# Allegro board N32926tiny.brd
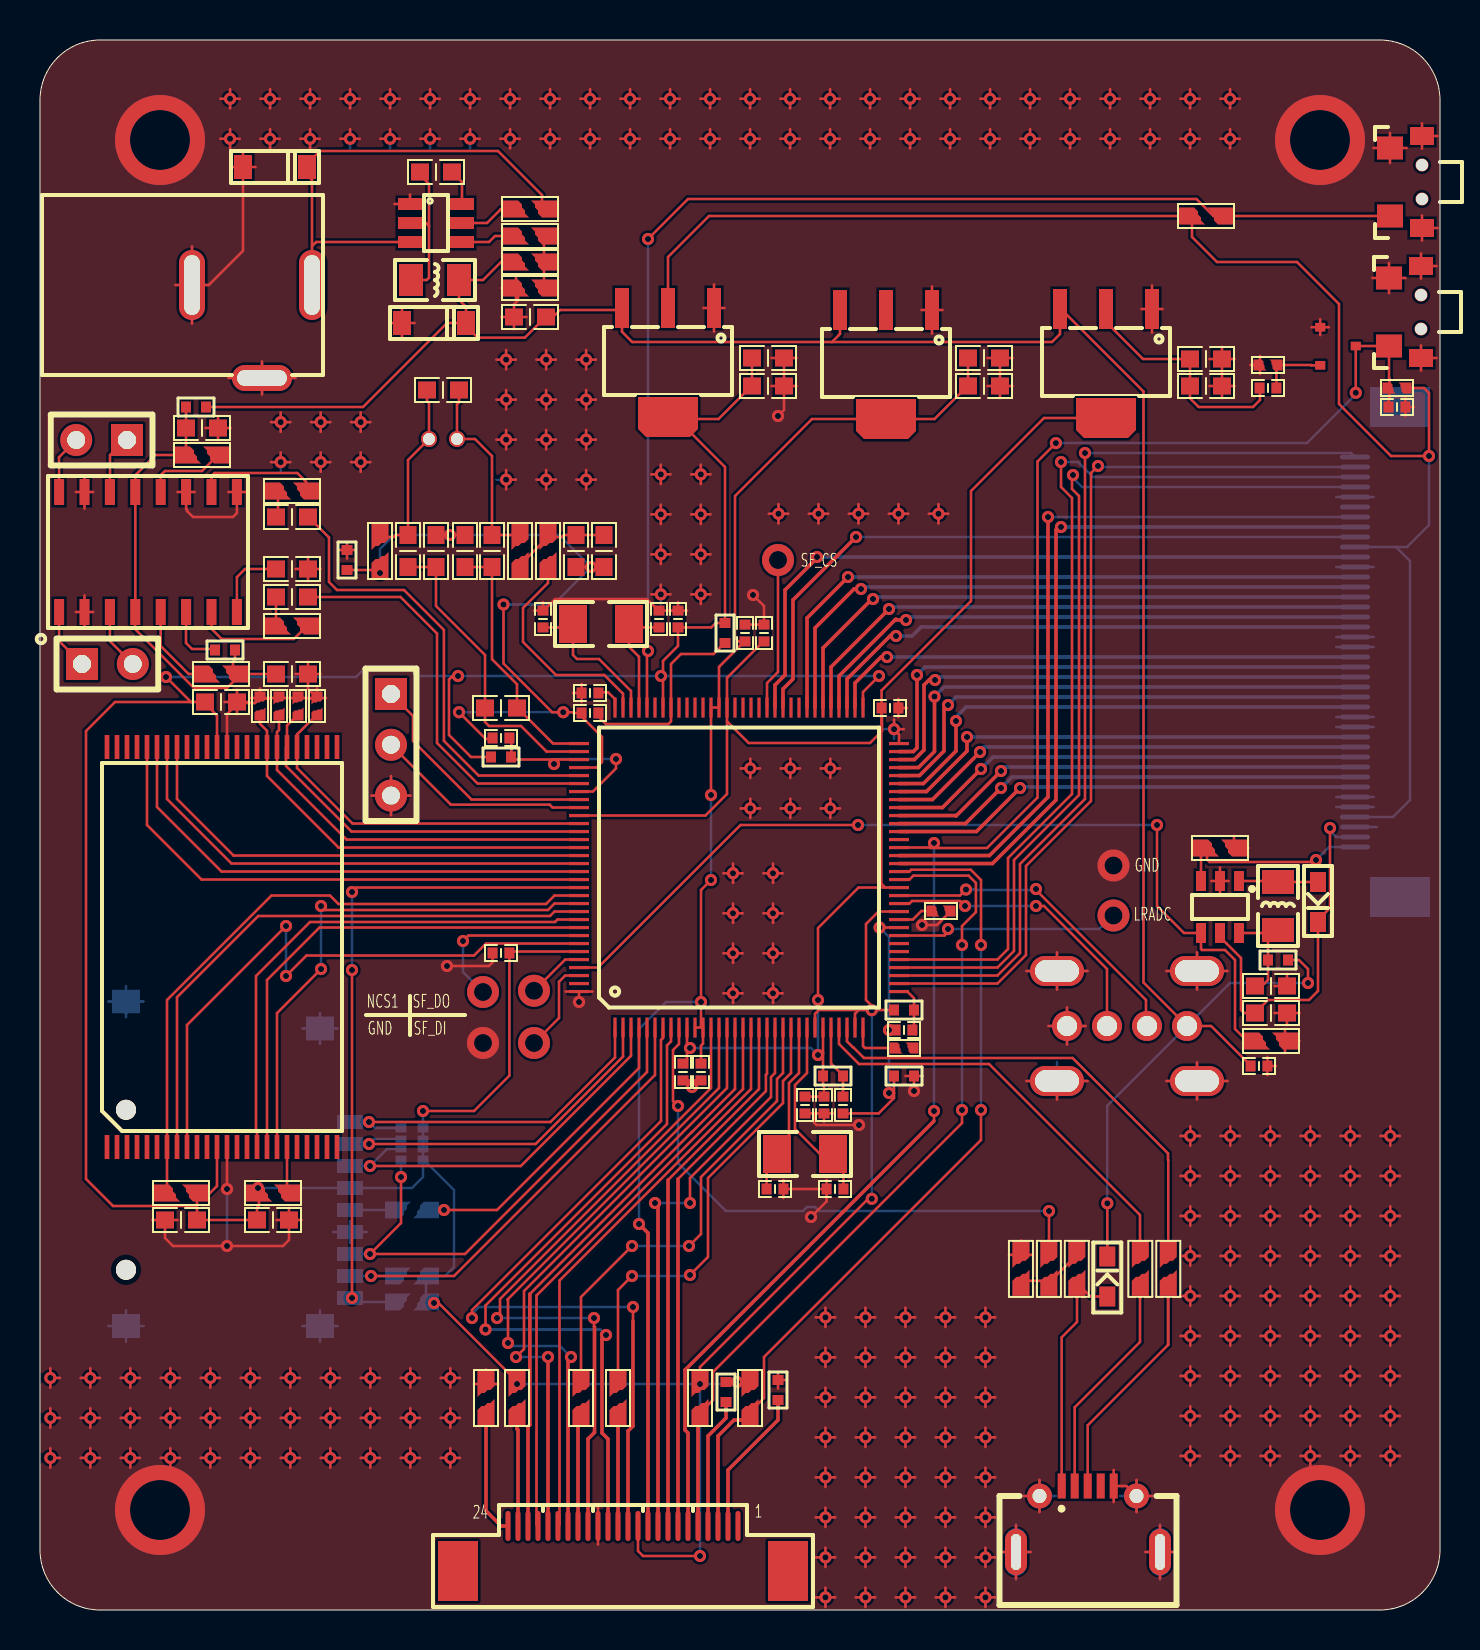
[diagram p0: board, top side]
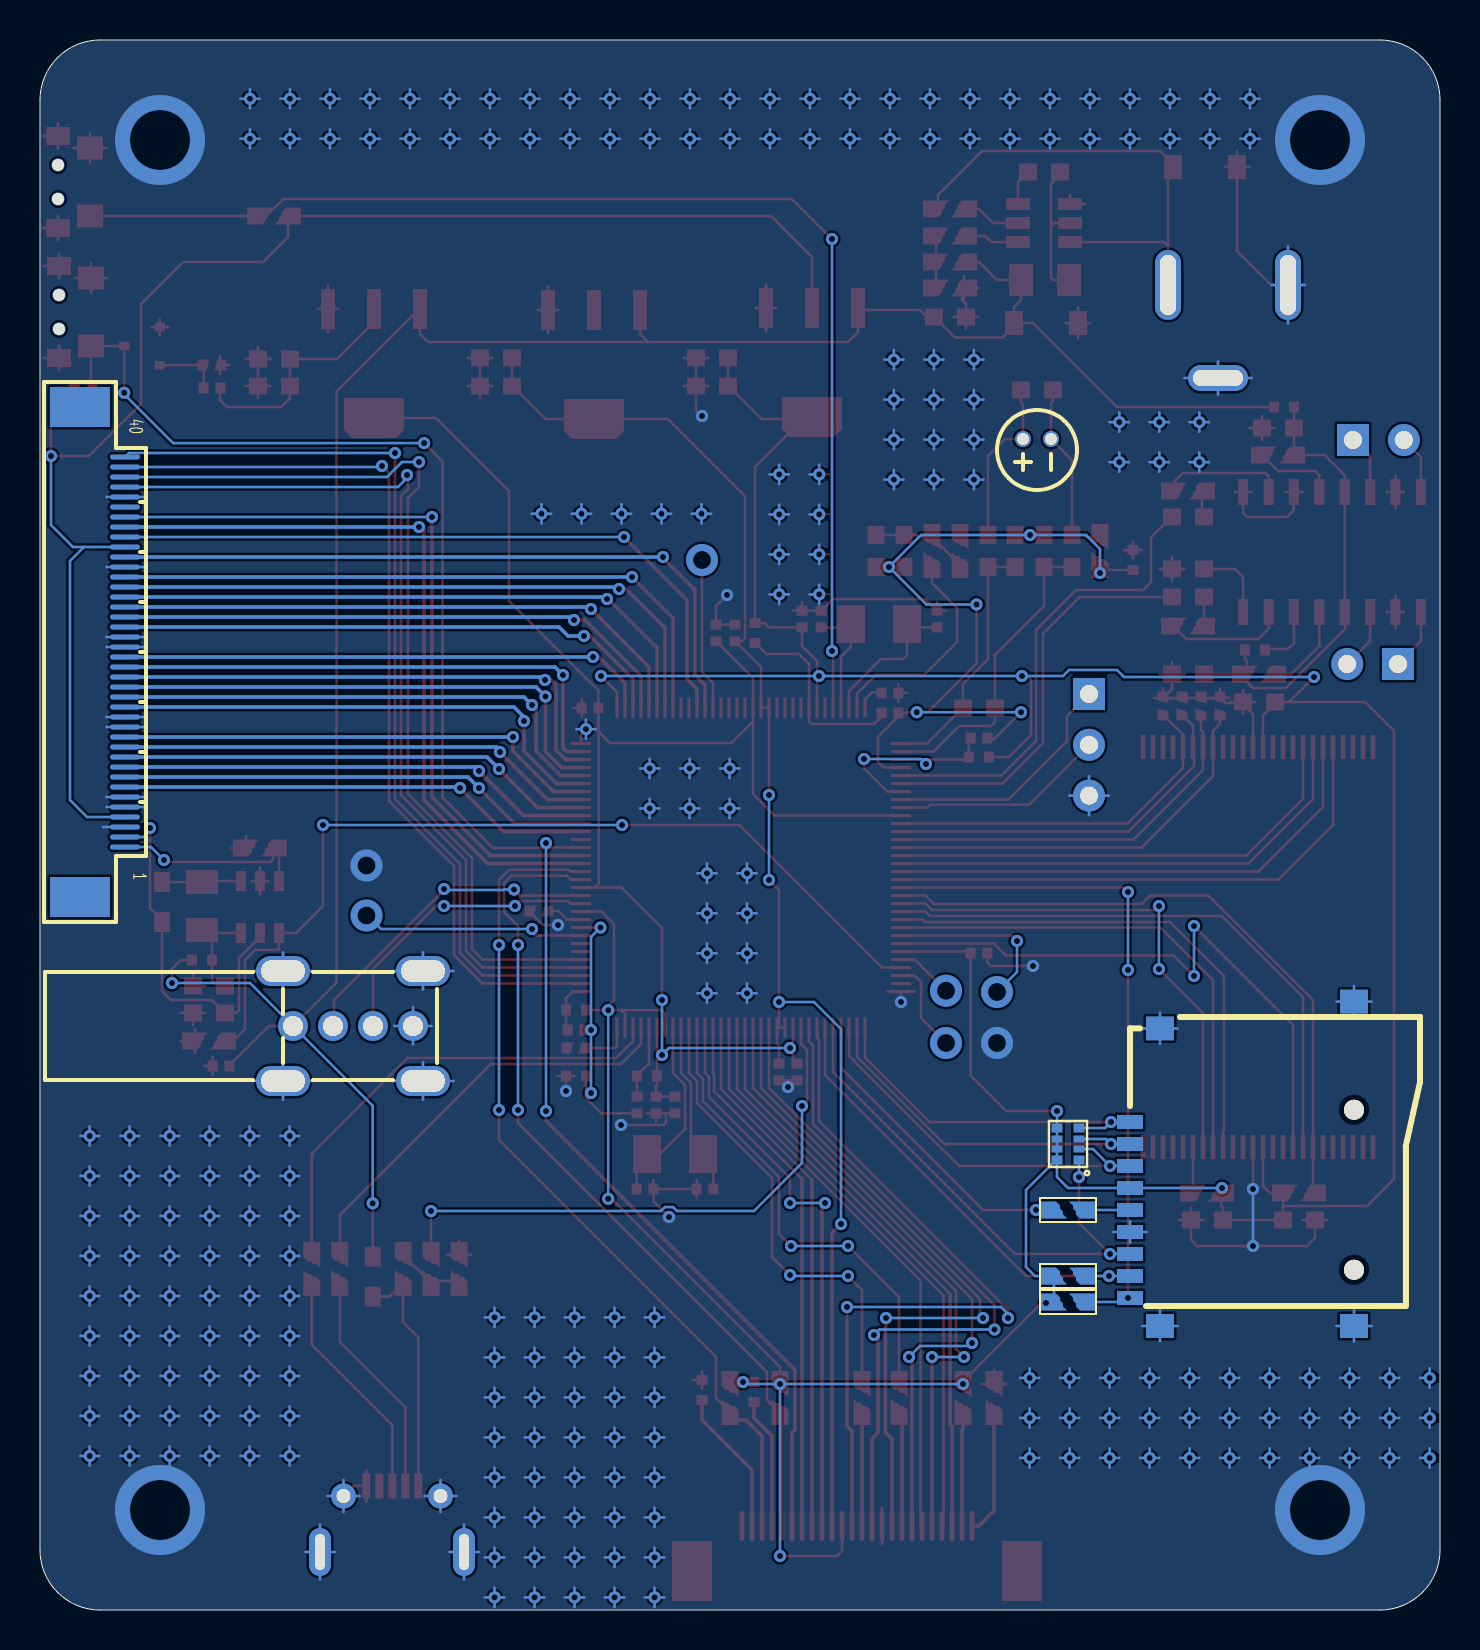
[diagram p1: board, bottom side, seen from below]

Outline 70 x 78.5 mm; copper layers: TOP, BOTTOM. Coordinates in mm from the lower left corner of the outline.
Outline path: 0,75.5 arc(0.88,77.62) 3,78.5 67,78.5 arc(69.12,77.62) 70,75.5 70,3 arc(69.12,0.88) 67,0 3,0 arc(0.88,0.88) 0,3 0,75.5

## Design rules (mm)
constraint set DEFAULT: min track width 0.127

## Placement (name value [footprint] x y rotation side)
C1  1uF  [CAP0402]  27.5 45.85 180 top
C2  15pF  [CAP0402]  30.95 49.55 90 top
C3  15pF  [CAP0402]  25.15 49.55 90 top
C4  15pF  [CAP0402]  39.75 21.05 180 top
C5  15pF  [CAP0402]  36.75 21.05 0 top
C7  100nF  [CAP0402]  32.15 26.9 270 top
C9  100nF  [CAP0402]  23.05 32.85 180 top
C10  100nF  [CAP0402]  36.2 48.85 90 top
C11  0.1uF  [CAP0402]  61.4 61.1 0 top
C12  100nF  [CAP0402]  23.05 43.6 180 top
C14  100nF  [CAP0402]  42.5 45.1 0 top
C15  0.1uF  [CAP0402]  67.85 60.15 0 top
C16  100nF  [CAP0402]  27.5 44.85 180 top
C18  100nF  [CAP0402]  39.2 25.25 270 top
C19  100nF  [CAP0402]  43.2 29 180 top
C21  100nF  [CAP0402]  38.25 25.25 270 top
C22  100nF  [CAP0402]  40.15 25.25 270 top
C23  100nF  [CAP0402]  31.9 49.55 90 top
C25  100nF  [CAP0402]  33.05 26.9 270 top
C26  100nF  [CAP0402]  35.25 48.85 90 top
C28  0.01uF  [CAP0603]  9.05 45.4 0 top
C29  0.01uF  [CAP0603]  7.05 19.5 180 top
C31  0.01uF  [CAP0603]  11.65 19.5 180 top
C32  1uF  [CAP0603]  61.55 31.2 0 top
C33  0.22uF  [CAP0603]  61.55 29.85 0 top
C34  10uF  [CAP0603]  8.1 59.1 0 top
C36  10uF  [CAP0603]  12.6 46.8 0 top
C39  220nF  [CAP0603]  12.6 50.65 180 top
C40  220nF  [CAP0603]  12.6 54.65 0 top
C41  1uF  [CAP0603]  12.6 52.05 180 top
C42  2.2uF  [CAP0603]  26.8 52.95 270 top
C43  100nF  [CAP0603]  28.2 52.95 270 top
C44  2.2uF  [CAP0603]  22.6 52.95 270 top
C45  470pF  [CAP0603]  23.05 45.1 0 top
C46  330pF  [CAP0603]  20.15 61 0 top
C47  2.2uF  [CAP0603]  18.4 52.95 270 top
C48  330pF  [CAP0603]  21.25 52.95 90 top
C49  330pF  [CAP0603]  19.8 52.95 90 top
C50  100nF  [CAP0603]  24.5 64.65 180 top
C51  2.2uF  [CAP0603]  36.4 61.2 0 top
C52  100nF  [CAP0603]  36.4 62.6 0 top
C54  2.2uF  [CAP0603]  47.2 61.2 0 top
C55  100nF  [CAP0603]  47.2 62.6 0 top
C57  2.2uF  [CAP0603]  58.3 61.2 0 top
C58  100nF  [CAP0603]  58.3 62.55 0 top
C59  1uF  [CAP0603]  19.8 71.9 0 top
C60  22uF  [CAP3216]  19.7 64.35 180 top
C61  6V/22uF  [CAP3216]  11.75 72.15 180 top
C63  0.1uF  [CAP0402]  60.95 27.2 0 top
D1  1N4148  [1N4148-SOD323]  63.9 35.4 90 top
D2  1N4148  [1N4148-SOD323]  53.36 16.68 270 top
J2  -  [TF-SOCKET]  15.5 24.4 90 bottom
J3  LCD_RGB_40P  [FPC-40]  68.1 47.9 270 bottom
J4  OV2640_DVP_24P  [FPC-24]  25.15 1.85 0 top
J5  Speaker Left  [HEADER1X2_2_54]  2.1 47.3 90 top
J6  Speaker Right  [HEADER1X2_2_54]  4.35 58.5 270 top
J7  Debug  [HEADER1X3_2_54]  17.55 45.8 0 top
J10  DC 005 25A  [DC_005_25A]  0.1 66.25 0 top
J11  USB  [USB-AF]  54.35 29.2 90 bottom
J12  USB  [MICROUSB]  52.4 5.7 180 top
L1  BLM15AG102  [BLM15AG221SN1D]  23.05 42.65 0 top
L2  BLM15AG102  [BLM15AG221SN1D]  34.25 48.85 270 top
L3  BLM15AG102  [BLM15AG221SN1D]  43.2 26.7 0 top
L4  BLM15AG102  [BLM15AG221SN1D]  34.3 10.9 90 top
L5  BLM15AG102  [BLM15AG221SN1D]  36.9 11 90 top
L6  BLM15AG102  [BLM15AG221SN1D]  61.9 32.5 180 top
L7  22uH  [MLF2012]  61.9 35.2 90 top
L8  10uH  [BLM15AG221SN1D]  9.25 48 180 top
L9  4.7uH  [MLF2012]  19.75 66.5 0 top
L10  BLM15AG102  [BLM15AG221SN1D]  7.8 60.15 0 top
L11  BLM15AG102  [BLM15AG221SN1D]  43.2 30 180 top
L12  BLM15AG102  [BLM15AG221SN1D]  39.65 26.7 180 top
L13  BLM15AG102  [BLM15AG221SN1D]  15.35 52.5 90 top
Q1  SS8050  [SOT23]  64.9 63.2 0 top
R1  12.1K 1%  [RES0402]  43.2 28.1 0 top
R2  12.1K 1%  [RES0402]  45.05 34.95 0 top
R3  100K  [RES0603]  58.3 69.7 0 top
R4  100K  [RES0402]  67.85 61.1 0 top
R5  10K  [RES0402]  61.4 62.25 180 top
R6  10K  [RES0402]  13.85 45.2 90 top
R7  10K  [RES0402]  12.9 45.2 90 top
R8  10K  [RES0402]  11.95 45.2 90 top
R9  10K  [RES0402]  11 45.2 90 top
R10  100K  [RES0603]  7.05 20.85 180 top
R11  100K  [RES0603]  11.65 20.85 0 top
R12  100K  [RES0603]  18.6 16.7 0 bottom
R13  100K  [RES0603]  18.6 15.4 0 bottom
R14  22R  [RES0603]  18.6 20 180 bottom
R15  22R  [RES0603]  28.9 10.6 270 top
R16  22R  [RES0603]  27.05 10.6 270 top
R17  0R/DNP  [RES0603]  23.85 10.6 270 top
R18  0R/DNP  [RES0603]  22.3 10.6 270 top
R19  10K  [RES0603]  33 10.6 270 top
R20  10K  [RES0603]  35.5 10.6 270 top
R21  5R1  [RES0603]  59 38.1 0 top
R22  100K  [RES0603]  61.55 28.45 0 top
R24  10K  [RES0603]  8.1 57.75 180 top
R28  10K  [RES0603]  12.6 49.2 0 top
R29  10K  [RES0603]  12.6 55.95 180 top
R30  10K  [RES0603]  9.05 46.8 180 top
R32  0R  [RES0603]  25.4 52.95 90 top
R33  1.5K  [RES0603]  24 52.95 90 top
R34  5.1K  [RES0603]  17 52.95 90 top
R35  100K  [RES0603]  24.5 70.05 180 top
R36  40.2K  [RES0603]  24.5 67.4 0 top
R37  75K  [RES0603]  24.5 68.7 0 top
R38  13K  [RES0603]  24.5 66.1 0 top
R39  22R  [RES0603]  55.02 17.06 90 top
R40  22R  [RES0603]  56.41 17.06 90 top
R41  10K  [RES0603]  50.44 17.06 90 top
R42  10K  [RES0603]  51.84 17.06 90 top
R43  22K  [RES0603]  49.05 17.06 90 top
RN1  10K 0402 RESAR  [RN4D02_0402]  18.6 23.3 90 bottom
SW1  TS_018-4.55x3.5x1.8  [TS_018-4P55X3P5X1P8]  69.1 71.4 0 top
SW2  TS_018-4.55x3.5x1.8  [TS_018-4P55X3P5X1P8]  69.05 64.9 0 top
U1  N3292xUxDN  [N3292XUXDN-LQFP128]  34.95 37.12 90 top
U2  W29N01  [W290XHVSINA-TSOP48]  9.1 33.15 90 top
U3  PT4101  [PT4101-SOT23-6]  59 35.15 270 top
U4  PAM8403  [PAM8403-SOP16]  5.4 52.9 90 top
U5  MIC  [GMI4015-MIC]  20.15 58 90 bottom
U6  AMS1117-SOT223-3-3V3  [AMS1117-SOT223-3]  31.4 62.45 180 top
U7  AMS1117-SOT223-3-1V8  [AMS1117-SOT223-3]  42.3 62.35 180 top
U8  AMS1117-SOT223-3-1V2  [AMS1117-SOT223-3]  53.3 62.4 180 top
U9  MP1470  [MP1470-TSOT23-6]  19.8 69.35 270 top
Y1  32768Hz  [CRYSTAL-3215]  28.05 49.3 180 top
Y2  12MHz  [CRYSTAL-3215]  38.25 22.8 180 top

## Library data of the parts
C1-C5 C7 C9-C12 C14-C16 C18 C19 C21-C23 C25 C26 C28 C29 C31 C50 C52 C55 C58 C63 = CAP NP
C32-C34 C36 C39-C41 C43 C45 C46 C48 C49 C59-C61 = CAPACITOR NON-POL
C42 C44 C47 C51 C54 C57 = CAP POL
D1 D2 = DIODE
J2 = TF-SOCKET
J3 = LCD_RGB_40P
J4 = OV2640_DVP_24P
J5 J6 = HEADER 2
J7 = HEADER 3
J10 = DC005-25A
J11 = USB AF
J12 = MICROUSB
L1-L6 L10-L13 = INDUCTOR
L7-L9 = INDUCTOR/SM
Q1 = BPW37/TO
R1-R20 R39-R43 = RESISTOR
R21 R22 R24 R28-R30 R32-R38 = RESISTOR/SM
RN1 = RESAR_IS_4/SM
SW1 SW2 = TS_018-4.55x3.5x1.8
U1 = N3292xUxDN
U2 = W29N01 GVSCAA
U3 = PT4101
U4 = PAM8403
U5 = MIC
U6-U8 = ASM1117-SOT223-3
U9 = MP1470
Y1 Y2 = CRYSTAL

## Footprints (pads in the part's own frame, mm; a bottom-side part is the same pattern mirrored in y, then rotated)
1N4148-SOD323
  custom 1x0.8 smd: 1(-1,0) 2(1,0)
AMS1117-SOT223-3
  custom 0.7x2 smd: 1(-2.3,-2.65) 2(0,-2.65) 3(2.3,-2.65)
  custom 3x2 smd: 4(0,2.8)
BLM15AG221SN1D
  custom 0.5x0.55 smd: 1(-0.5,0) 2(0.5,0)
CAP0402
  custom 0.5x0.55 smd: 1(-0.42,0) 2(0.42,0)
CAP0603
  custom 0.9x0.85 smd: 1(-0.8,0) 2(0.8,0)
CAP3216
  custom 0.9x1.2 smd: 1(-1.6,0) 2(1.6,0)
CRYSTAL-3215
  custom 1.4x1.9 smd: 1(-1.4,0) 2(1.4,0)
DC_005_25A
  oval 1.3x3.5 hole 0.8x3: 1(13.5,0) 2(7.5,0)
  oval 3x1.3 hole 2.5x0.8: 3(11,-4.65)
FPC-24
  rect 2x3 smd: (-4.25,0.1) (12.25,0.1)
  oval 0.25x1.5 smd: 1(9.75,2.35) 2(9.25,2.35) 3(8.75,2.35) 4(8.25,2.35) 5(7.75,2.35) 6(7.25,2.35) 7(6.75,2.35) 8(6.25,2.35) 9(5.75,2.35) 10(5.25,2.35) 11(4.75,2.35) 12(4.25,2.35) 13(3.75,2.35) 14(3.25,2.35) 15(2.75,2.35) 16(2.25,2.35) 17(1.75,2.35) 18(1.25,2.35) 19(0.75,2.35) 20(0.25,2.35) 21(-0.25,2.35) 22(-0.75,2.35) 23(-1.25,2.35) 24(-1.75,2.35)
FPC-40
  rect 2x3 smd: (-12.25,0.1) (12.25,0.1)
  oval 0.25x1.5 smd: 1(9.75,2.35) 2(9.25,2.35) 3(8.75,2.35) 4(8.25,2.35) 5(7.75,2.35) 6(7.25,2.35) 7(6.75,2.35) 8(6.25,2.35) 9(5.75,2.35) 10(5.25,2.35) 11(4.75,2.35) 12(4.25,2.35) 13(3.75,2.35) 14(3.25,2.35) 15(2.75,2.35) 16(2.25,2.35) 17(1.75,2.35) 18(1.25,2.35) 19(0.75,2.35) 20(0.25,2.35) 21(-0.25,2.35) 22(-0.75,2.35) 23(-1.25,2.35) 24(-1.75,2.35) 25(-2.25,2.35) 26(-2.75,2.35) 27(-3.25,2.35) 28(-3.75,2.35) 29(-4.25,2.35) 30(-4.75,2.35) 31(-5.25,2.35) 32(-5.75,2.35) 33(-6.25,2.35) 34(-6.75,2.35) 35(-7.25,2.35) 36(-7.75,2.35) 37(-8.25,2.35) 38(-8.75,2.35) 39(-9.25,2.35) 40(-9.75,2.35)
GMI4015-MIC
  round 0.8 hole 0.6: 1(0.55,0.7) 2(0.55,-0.7)
HEADER1X2_2_54
  rect 1.6x1.6 hole 0.9: 1(0,0)
  round 1.6 hole 0.9: 2(0,-2.54)
HEADER1X3_2_54
  rect 1.6x1.6 hole 0.9: 1(0,0)
  round 1.6 hole 0.9: 2(0,-2.54) 3(0,-5.08)
MICROUSB
  rect 0.4x1.25 smd: 1(1.315,-0.5) 2(0.665,-0.5) 3(0.015,-0.5) 4(-0.635,-0.5) 5(-1.285,-0.5)
  round 1.25 hole 0.7: 6(-2.425,0) 7(2.425,0)
  oval 1.1x2.3 hole 0.5x1.8: 8(-3.6,2.8) 9(3.6,2.8)
MLF2012
  custom 1.2x1.6 smd: 1(-1.2,0) 2(1.2,0)
MP1470-TSOT23-6
  custom 0.6x1.2 smd: 1(-0.95,-1.3) 2(0,-1.3) 3(0.95,-1.3) 4(0.95,1.3) 5(0,1.3) 6(-0.95,1.3)
N3292XUXDN-LQFP128
  custom 1x0.16 smd: 1(-8,6.2) 2(-8,5.8) 3(-8,5.4) 4(-8,5) 5(-8,4.6) 6(-8,4.2) 7(-8,3.8) 8(-8,3.4) 9(-8,3) 10(-8,2.6) 11(-8,2.2) 12(-8,1.8) 13(-8,1.4) 14(-8,1) 15(-8,0.6) 16(-8,0.2) 17(-8,-0.2) 18(-8,-0.6) 19(-8,-1) 20(-8,-1.4) 21(-8,-1.8) 22(-8,-2.2) 23(-8,-2.6) 24(-8,-3) 25(-8,-3.4) 26(-8,-3.8) 27(-8,-4.2) 28(-8,-4.6) 29(-8,-5) 30(-8,-5.4) 31(-8,-5.8) 32(-8,-6.2) 65(8,-6.2) 66(8,-5.8) 67(8,-5.4) 68(8,-5) 69(8,-4.6) 70(8,-4.2) 71(8,-3.8) 72(8,-3.4) 73(8,-3) 74(8,-2.6) 75(8,-2.2) 76(8,-1.8) 77(8,-1.4) 78(8,-1) 79(8,-0.6) 80(8,-0.2) 81(8,0.2) 82(8,0.6) 83(8,1) 84(8,1.4) 85(8,1.8) 86(8,2.2) 87(8,2.6) 88(8,3) 89(8,3.4) 90(8,3.8) 91(8,4.2) 92(8,4.6) 93(8,5) 94(8,5.4) 95(8,5.8) 96(8,6.2)
  custom 0.16x1 smd: 33(-6.2,-8) 34(-5.8,-8) 35(-5.4,-8) 36(-5,-8) 37(-4.6,-8) 38(-4.2,-8) 39(-3.8,-8) 40(-3.4,-8) 41(-3,-8) 42(-2.6,-8) 43(-2.2,-8) 44(-1.8,-8) 45(-1.4,-8) 46(-1,-8) 47(-0.6,-8) 48(-0.2,-8) 49(0.2,-8) 50(0.6,-8) 51(1,-8) 52(1.4,-8) 53(1.8,-8) 54(2.2,-8) 55(2.6,-8) 56(3,-8) 57(3.4,-8) 58(3.8,-8) 59(4.2,-8) 60(4.6,-8) 61(5,-8) 62(5.4,-8) 63(5.8,-8) 64(6.2,-8) 97(6.2,8) 98(5.8,8) 99(5.4,8) 100(5,8) 101(4.6,8) 102(4.2,8) 103(3.8,8) 104(3.4,8) 105(3,8) 106(2.6,8) 107(2.2,8) 108(1.8,8) 109(1.4,8) 110(1,8) 111(0.6,8) 112(0.2,8) 113(-0.2,8) 114(-0.6,8) 115(-1,8) 116(-1.4,8) 117(-1.8,8) 118(-2.2,8) 119(-2.6,8) 120(-3,8) 121(-3.4,8) 122(-3.8,8) 123(-4.2,8) 124(-4.6,8) 125(-5,8) 126(-5.4,8) 127(-5.8,8) 128(-6.2,8)
PAM8403-SOP16
  custom 1.3x0.5 smd: 1(-3,4.445) 2(-3,3.175) 3(-3,1.905) 4(-3,0.635) 5(-3,-0.635) 6(-3,-1.905) 7(-3,-3.175) 8(-3,-4.445) 9(3,-4.445) 10(3,-3.175) 11(3,-1.905) 12(3,-0.635) 13(3,0.635) 14(3,1.905) 15(3,3.175) 16(3,4.445)
PT4101-SOT23-6
  custom 1x0.5 smd: 1(-1.3,0.95) 2(-1.3,0) 3(-1.3,-0.95) 4(1.3,-0.95) 5(1.3,0) 6(1.3,0.95)
RES0402
  custom 0.65x0.55 smd: 1(-0.4,0) 2(0.4,0)
RES0603
  custom 1.3x0.85 smd: 1(-0.7,0) 2(0.7,0)
RN4D02_0402
  rect 0.45x0.55 smd: 1(-0.8,-0.55) 4(0.8,-0.55) 5(0.8,0.55) 8(-0.8,0.55)
  rect 0.35x0.55 smd: 2(-0.25,-0.55) 3(0.25,-0.55) 6(0.25,0.55) 7(-0.25,0.55)
SOT23
  rect 0.508x0.432 smd: 1(-0.889,0.94) 2(-0.889,-0.965) 3(0.889,0)
TF-SOCKET
  round 1 hole 1.1 unplated: (-7.39,-11.2) (0.61,-11.2)
  rect 0.7x1.3 smd: 1(0,0) 2(-1.1,0) 3(-2.2,0) 4(-3.3,0) 5(-4.4,0) 6(-5.5,0) 7(-6.6,0) 8(-7.7,0) 9(-8.8,0)
  rect 1.2x1.4 smd: 10(-10.2,-1.5) 11(4.68,-1.5) 12(-10.2,-11.2) 13(6.02,-11.2)
TS_018-4P55X3P5X1P8
  round 0.65 hole 0.6: (0,0.85) (0,-0.85)
  custom 1.2x0.9 smd: 1(0,2.3) 2(0,-2.3)
  custom 1.3x1.15 smd: 3(-1.6,1.7) 4(-1.6,-1.7)
USB-AF
  round 1.5 hole 1: 1(0,3) 2(0,1) 3(0,-1) 4(0,-3)
  oval 1.5x2.7 hole 1.1x2.2: 5(-2.75,3.5) 6(2.75,3.5) 7(-2.75,-3.5) 8(2.75,-3.5)
W290XHVSINA-TSOP48
  custom 1.2x0.23 smd: 1(-10,5.75) 2(-10,5.25) 3(-10,4.75) 4(-10,4.25) 5(-10,3.75) 6(-10,3.25) 7(-10,2.75) 8(-10,2.25) 9(-10,1.75) 10(-10,1.25) 11(-10,0.75) 12(-10,0.25) 13(-10,-0.25) 14(-10,-0.75) 15(-10,-1.25) 16(-10,-1.75) 17(-10,-2.25) 18(-10,-2.75) 19(-10,-3.25) 20(-10,-3.75) 21(-10,-4.25) 22(-10,-4.75) 23(-10,-5.25) 24(-10,-5.75) 25(10,-5.75) 26(10,-5.25) 27(10,-4.75) 28(10,-4.25) 29(10,-3.75) 30(10,-3.25) 31(10,-2.75) 32(10,-2.25) 33(10,-1.75) 34(10,-1.25) 35(10,-0.75) 36(10,-0.25) 37(10,0.25) 38(10,0.75) 39(10,1.25) 40(10,1.75) 41(10,2.25) 42(10,2.75) 43(10,3.25) 44(10,3.75) 45(10,4.25) 46(10,4.75) 47(10,5.25) 48(10,5.75)

## Nets
AVDD1V2: C22.1 L12.1 U1.28
AVDD3V3: C19.1 L11.1 U1.33
AVDD3V3_AUDIO: C12.1 L1.2 U1.99 U1.103
AVDD3V3_TV: C16.1 L2.2 U1.89
AVDD5V: C34.1 C36.1 L8.1 L10.1 R24.2 R30.1 U4.4 U4.13
DVDD1V2: C7.1 C10.1 C11.1 C14.1 C18.1 C21.1 C57.1 C58.1 L12.2 U1.10 U1.27 U1.46 U1.82 U1.106 U8.2 U8.4(VOUT)
DVDD1V8: C25.1 C26.1 C54.1 C55.1 J4.10 U1.11 U1.12 U1.83 U1.84 U7.2 U7.4(VOUT)
DVDD5V: C50.1 C60.1 C63.1 D2.1(K) J11.1(VBUS) L6.1 L9.2 L10.2 R36.1 U6.3 U7.3 U8.3
DVDD33: C9.1 C23.1 C28.1 C29.1 C31.2 C51.1 C52.1 J2.4(VDD) J3.4 J3.31 J4.11 L1.1 L2.1 L4.2 L11.2 R3.1 R4.2 R10.1 R11.1 R12.2 R13.2 R17.1 R19.1 R20.1 RN1.5 RN1.6 RN1.7 RN1.8 U1.26 U1.31 U1.43 U1.65 U1.90 U1.123 U2.12 U2.37 U6.2 U6.4(VOUT)
GND: C1.2 C2.2 C3.2 C4.2 C5.2 C7.2 C9.2 C10.2 C14.2 C15.2 C18.2 C21.2 C23.2 C25.2 C26.2 C28.2 C29.2 C31.1 C32.2 C33.2 C34.2 C36.2 C41.1 C50.2 C51.2 C52.2 C54.2 C55.2 C57.2 C58.2 C60.2 C61.2 C63.2 J2.6 J2.10 J2.11 J2.12 J2.13 J3.3 J3.5 J3.6 J3.13 J3.14 J3.21 J3.22 J3.29 J3.36 J4.15 J7.3 J10.2(COM) J10.3 J11.4 J11.5 J11.6 J11.7 J11.8 J12.5 J12.6 J12.7 J12.8 J12.9 L3.2 L5.2 L13.2 Q1.1(EMITTER) R1.2 R2.2 R5.2 R6.2 R7.2 R8.2 R9.2 R18.1 R21.2 R22.2 R38.1 R43.2 SW1.1 SW1.2 SW1.3 SW2.1 SW2.2 SW2.3 U1.64 U1.128 U2.13 U2.36 U3.2 U4.2 U4.9 U4.11 U4.15 U6.1 U7.1 U8.1 U9.1
GND_FIELD SIGNAL: C19.2 C22.2 L3.1 U1.41
GND_SIGNAL: C12.2 C16.2 C42.2 C43.2 C48.2 C49.2 L13.1 R34.1 U1.100
PVIN: C61.1 J10.1 R35.1 U9.3
ADC_MID: C1.1 U1.96
BL_5V: C32.1 L6.2 L7.1 U3.6
BL_ADJ: R22.1 U1.125 U3.4
DEBUG_RX: J7.2 U1.105
DEBUG_TX: J7.1 U1.104
ETH_CRS: U1.85
ETH_INT: U1.52
ETH_MDC: U1.74
ETH_MDIO: U1.78
ETH_REFCLK: U1.73
ETH_RESET: C15.1 J4.6 Q1.3 R4.1 SW2.4 U1.51
ETH_RXD0: U1.86
ETH_RXD1: U1.87
ETH_RXER: U1.88
ETH_TXD0: U1.79
ETH_TXD1: U1.80
ETH_TXEN: U1.81
GPG7: U1.38
HPOUTL: C39.1 U1.102
HPOUTR: C40.2 U1.101
ISI_HSYNC: J4.9 U1.21
ISI_PCLK: R16.1 U1.22
ISI_PWDN: J4.8 U1.19
ISI_SCL: J4.5 R19.2 U1.47
ISI_SCLK: R15.1 U1.23
ISI_SDA: J4.3 R20.2 U1.48
ISI_VSYNC: J4.7 U1.20
LED+: C33.1 D1.1(K) J3.2 U3.5
LED-: J3.1 R21.1 U3.3
LHSYNC: J3.32 U1.75
LPCLK: J3.30 U1.76
LRADC: U1.40
LVD0: J3.23 U1.67
LVD1: J3.24 U1.68
LVD2: J3.25 U1.69
LVD3: J3.26 U1.70
LVD4: J3.27 U1.71
LVD5: J3.28 U1.72
LVD6: J3.15 U1.59
LVD7: J3.16 U1.60
LVD8: J3.17 U1.61
LVD9: J3.18 U1.62
LVD10: J3.19 U1.63
LVD11: J3.20 U1.66
LVD12: J3.7 U1.53
LVD13: J3.8 U1.54
LVD14: J3.9 U1.55
LVD15: J3.10 U1.56
LVD16: J3.11 U1.57
LVD17: J3.12 U1.58
LVDE: J3.34 U1.50
LVSYNC: J3.33 U1.49
MIC_BIAS: R32.1 U1.95
MIC_INN: C45.1 C47.2 C49.1 U1.98
MIC_INP: C44.2 C45.2 C48.1 U1.97
MUTE: R30.2 U4.5
NALE: U1.120 U2.17
NBUSY0: R10.2 U1.116 U2.7
NCLE: U1.119 U2.16
NCS0: U1.122 U2.9
NCS1: U1.121
ND0: R6.1 U1.107 U2.29
ND1: R7.1 U1.108 U2.30
ND2: R8.1 U1.109 U2.31
ND3: R9.1 U1.110 U2.32
ND4: U1.111 U2.41
ND5: U1.112 U2.42
ND6: U1.113 U2.43
ND7: U1.114 U2.44
NRE: U1.118 U2.8
NWR: U1.117 U2.18
OUTLM: J5.2 U4.3
OUTLP: J5.1 U4.1
OUTRM: J6.1 U4.14
OUTRP: J6.2 U4.16
RTC_XIN: C2.1 U1.93 Y1.1
RTC_XOUT: C3.1 U1.94 Y1.2
SD_CD: J2.9 R13.1 U1.115
SD_CLK: R14.1 U1.4
SD_CMD: J2.3 RN1.2 U1.3
SD_D0: J2.7 RN1.1 U1.5
SD_D1: J2.8 R12.1 U1.6
SD_D2: J2.1 RN1.4 U1.1
SD_D3: J2.2 RN1.3 U1.2
SF_CLK: U1.127
SF_CS: U1.77
SF_DI: U1.126
SF_DO: U1.124
SPD0: J4.19 U1.18
SPD1: J4.21 U1.17
SPD2: J4.22 U1.16
SPD3: J4.20 U1.15
SPD4: J4.18 U1.14
SPD5: J4.16 U1.13
SPD6: J4.14 U1.8
SPD7: J4.12(Y9) U1.7
TP_XM: J3.39 U1.34
TP_XP: J3.37 U1.36
TP_YM: J3.40(YU) U1.35
TP_YP: J3.38 U1.37
UD_REXT: R1.1 U1.32
UH_DM: J11.2 U1.45
UH_DP: J11.3 U1.44
UH_REXT: R2.1 U1.42
USB_DET: R41.2 U1.9
USB_DM: R39.2 U1.29
USB_DP: R40.2 U1.30
USB_VIN: D2.2 J12.1(VBUS) R42.1
XIN: C4.1 U1.25 Y2.1
XOUT: C5.1 U1.24(XOUT) Y2.2
N04211: R11.2 U2.19(W\P\)
N06862: J2.5 R14.2
N15646006: J4.13 R15.2
N15646070: J4.17 R16.2
N15676008: R24.1 U4.12
N15676062: L8.2 U4.6
N15676114: C39.2 R28.1
N15676138: R28.2 U4.7
N15676142: R29.1 U4.10
N15676150: C40.1 R29.2
N15676164: C41.2 U4.8(VREF)
N15687660: C59.2 U9.6
N15687760: C59.1 L9.1 U9.2(SW)
N15687792: R35.2 U9.5
N15687876: R36.2 R37.2 R38.2
N15687912: R37.1 U9.4
N15691835: D1.2 L7.2 U3.1(SW)
N15705525: C42.1 C43.1 R32.2 R33.1
N15705529: C44.1 C46.2 R33.2 U5.1
N15705631: C46.1 C47.1 R34.2 U5.2(-)
N15714383: J12.2 R39.1
N15714387: J12.3 R40.1
N15739714: R3.2 SW1.4 U1.92
N15742573: C11.2 Q1.2 R5.1
N15750041: R41.1 R42.2 R43.1
N15763803: J4.24 R18.2
N15763807: J4.23 R17.2
N15841040: J4.4 L4.1
N15841559: J4.2 L5.1

Pads without a net: J3 35; J4 1; J12 4; U1 39 91; U2 1 2 3 4 5 6 10 11 14 15 20 21 22 23 24 25 26 27 28 33 34 35 38 39 40 45 46 47 48

## Via types
v1: diameter 0.61, hole 0.305, TOP to BOTTOM, 348 vias
v2: diameter 1.6, hole 0.9, TOP to BOTTOM, 7 vias
v3: diameter 4.5, hole 3, TOP to BOTTOM, 4 vias

## Routing (per net, layer and track width the routed paths; a pad name or vN(x,y) marks a point on that pad's centre or on a via; arc(x,y) is an arc through that point)
AVDD1V2: length 3.7
  TOP w0.127: U1.28 39.55,27.3 39.58,27.3 40.15,26.73 L12.1 C22.1
AVDD3V3: length 2.5
  TOP w0.127: U1.33 43.37,30.92 43.7,30.59 L11.1 43.7,29.08 C19.1
AVDD3V3_AUDIO: length 10.8
  TOP w0.127: v1(25.7,42.3) 25.7,42.32 25.9,42.52 ; v1(28.8,42.55) 28.8,42.08 27.64,40.92 U1.103 ; 25.9,42.52 23.68,42.52 L1.2 23.57,42.67 23.57,43.55 23.52,43.6 C12.1 ; 25.9,42.52 U1.99
  BOTTOM w0.127: v1(25.7,42.3) 25.95,42.55 v1(28.8,42.55)
AVDD3V3_TV: length 10.3
  TOP w0.127: 27.92,44.67 C16.1 27.92,44.87 ; 27.92,44.67 27.75,44.84 27.75,44.87 ; 27.92,44.67 28.29,44.3 31.42,44.3 31.55,44.43 U1.89 31.55,47.3 32.05,47.8 33.67,47.8 34.23,48.35 L2.2
AVDD5V: length 23.2
  TOP w0.127: R30.1 9.75,46.5 9.35,46.1 7.7,46.1 4.75,49.05 4.75,49.88 U4.4 U4.13 4.77,56.74 5.77,57.75 R24.2 7.3,57.85 C34.1 L10.1 ; R30.1 9.65,46.9 9.65,47.42 9.75,47.52 L8.1 ; R30.1 C36.1
DVDD1V2: length 92
  TOP w0.127: 39.15,27.85 L12.2 39.15,26.23 39.2,26.18 C18.1 C21.1 ; 39.15,27.85 U1.27 ; 39.15,27.85 39.05,27.75 v1(38.9,27.75) ; U1.106 33.27,39.72 34.35,40.8 34.35,44.43 ; v1(32.5,28.1) 32.4,28.2 32.35,28.2 ; C7.1 32.35,27.52 32.35,28.2 ; 42.26,36.12 42.07,36.32 42.07,44.62 42.08,44.63 ; 42.26,36.12 40.92,36.12 38.9,34.1 v1(38.9,30.5) ; 42.26,36.12 U1.46 ; U8.4 50.2,59.6 46.55,55.95 46.55,50.45 42.08,45.98 C14.1 42.08,44.63 ; C10.1 36.17,48.43 34.35,46.6 U1.82 34.35,44.43 ; 42.08,44.63 42.1,44.61 42.1,43.95 41.5,43.35 35.43,43.35 34.35,44.43 ; 32.35,28.2 U1.10 ; U8.2 53.3,64.4 55.15,62.55 C58.1 C57.1 57.5,60.58 57.93,60.15 60.65,60.15 61,60.5 61,61.08 C11.1
  BOTTOM w0.127: v1(32.5,28.1) 38.55,28.1 v1(38.9,27.75) v1(38.9,30.5)
DVDD1V8: length 74.4
  TOP w0.127: U1.12 33.15,28.31 33.05,28.21 C25.1 ; U1.12 33.05,29.22 v1(33.05,30.4) 33.05,36 v1(33.55,36.5) ; U1.12 U1.11 ; 35.23,48.43 34.92,48.43 34.75,48.6 34.75,55.7 38.6,59.55 U7.4 44.73,59.55 46.38,61.2 C54.1 C55.1 ; 35.23,48.43 33.95,47.16 U1.83 U1.84 v1(33.55,40.75) ; 35.23,48.43 C26.1
  TOP w0.18: v1(29.95,19.3) 30.4,18.85 J4.10
  BOTTOM w0.127: v1(29.95,19.3) 29.95,29.05 31.3,30.4 v1(33.05,30.4) ; v1(33.55,36.5) v1(33.55,40.75)
DVDD5V: length 120.3
  TOP w0.127: C60.1 21.3,64.2 21.88,63.62 24.24,63.62 25.27,64.65 C50.1 25.65,64.65 26,65 29.05,65 29.05,65.2 29.1,65.15 U6.3 29.1,63.91 29.61,63.4 39.6,63.4 ; C60.1 21.3,65.16 20.95,65.51 L9.2 22.15,66.5 23.05,67.4 R36.1 ; C60.1 20.35,64.35 16.15,60.15 L10.2 ; v1(63.4,31.35) 63.4,32.05 62.95,32.5 L6.1 ; 39.6,63.4 50.6,63.4 51,63.8 U8.3 51.05,65.05 55.17,60.93 55.17,31.38 J11.1 58.55,29.2 60.53,27.23 C63.1 ; 39.6,63.4 39.95,63.75 39.95,63.76 40,63.81 U7.3 ; D2.1 v1(53.36,20.34)
  BOTTOM w0.127: v1(53.36,20.34) 53.36,25.21 J11.1 59.5,31.35 v1(63.4,31.35)
DVDD33: length 297.1
  TOP w0.127: v1(41.59,20.56) 41.41,20.56 33,12.15 v1(33,11.3) ; U1.43 41.92,34.92 41.3,34.3 41.3,30.5 41.59,30.21 ; 41.59,30.21 41.8,30 ; 41.59,30.21 v1(41.59,29.99) ; 41.8,30 40.94,30 ; 41.8,30 L11.2 ; L4.2 v1(34.85,11.4) 35.4,11.4 R20.1 ; 7.76,20.84 R10.1 ; 7.76,20.84 7.85,20.75 7.85,20.15 ; 7.76,20.84 8.49,20.84 8.85,21.2 U2.12 ; 7.55,45.4 3.75,45.4 2.3,43.95 2.3,21.55 3.65,20.2 7.8,20.2 7.85,20.15 ; 7.55,45.4 C28.1 8.25,45.38 ; 7.55,45.4 v1(6.3,46.65) ; 7.85,20.15 C29.1 ; 20.58,46.65 20.63,46.7 v1(20.9,46.7) ; 20.58,46.65 20.95,46.65 ; 20.58,46.65 20.45,46.52 20.45,43.75 21.55,42.65 L1.1 ; 8.25,45.33 8.23,45.35 8.25,45.38 ; 8.25,45.33 8.85,44.73 U2.37 ; 8.25,45.33 8.25,45.38 ; v1(41.95,46.7) 41.15,45.9 U1.65 ; 31.85,59.55 31.75,59.65 U6.4 ; 31.85,59.55 34.25,57.15 L2.1 33.78,49.35 33.56,49.13 C23.1 31.9,48.2 31.15,47.45 31.15,46.85 ; 31.85,59.55 31.35,59.55 ; 31.85,59.55 33.92,59.55 35.58,61.2 C51.1 C52.1 ; C29.1 C31.2 10.85,20.12 10.95,20.22 R11.1 ; C29.1 7.85,19.45 ; 40.94,30 40.75,29.81 U1.31 ; 40.94,30 38.94,30 38.75,29.81 U1.26 38.75,28.87 ; 31.15,46.85 31.05,46.75 v1(31.05,46.7) ; 31.15,46.85 U1.90 ; R4.2 69.2,61.1 69.45,60.85 v1(69.45,57.7) 67.55,57.7 64.95,60.3 64.95,65.3 62.85,67.4 58.85,67.4 57.6,68.65 R3.1 33.45,69.7 31.4,67.65 U6.2 ; v1(19.7,15.35) 19.93,15.35 23.85,11.42 v1(23.85,11.3) ; J4.11 29.9,2.95 30.15,2.7 v1(33,2.7) ; U1.123 23.54,32.92 C9.1 23.47,26.72 21.7,24.95 v1(19.15,24.95)
  BOTTOM w0.127: v1(33,2.7) v1(33,11.3) ; v1(33,11.3) 34.75,11.3 v1(34.85,11.4) ; v1(33,11.3) v1(23.85,11.3) ; v1(10.9,21.1) J2.4 18.6,21.1 19.15,21.65 RN1.8 ; v1(41.95,46.7) v1(31.05,46.7) v1(20.9,46.7) 18.85,46.7 18.55,47 16.15,47 15.8,46.65 v1(6.3,46.65) ; RN1.8 19.2,22.5 20.7,21 20.7,17.15 20.25,16.7 R12.2 R13.2 ; RN1.8 RN1.7 RN1.6 RN1.5 v1(19.15,24.95) ; 67.8,53.15 68.35,53.15 69.45,54.25 v1(69.45,57.7) ; 67.8,53.15 J3.31 ; 67.8,53.15 68.5,52.45 68.5,40.5 67.65,39.65 J3.4 ; v1(41.59,20.56) v1(41.59,29.99)
GND: length 1160.5
  TOP w0.127: 40.44,54.81 v1(40.92,54.81) ; v1(40.92,54.81) 41.41,54.81 ; v1(40.92,54.81) 40.92,54.33 ; v1(40.92,54.81) 40.92,55.29 ; v1(63.51,11.7) 64,11.7 ; v1(63.51,11.7) 63.51,11.22 ; v1(63.51,11.7) 63.51,12.18 ; v1(63.51,11.7) 63.03,11.7 ; 59.03,15.7 v1(59.51,15.7) ; v1(59.51,15.7) 60,15.7 ; v1(59.51,15.7) 59.51,16.18 ; v1(59.51,15.7) 59.51,15.22 ; v1(47.27,14.63) 47.76,14.63 ; v1(47.27,14.63) 47.27,14.15 ; v1(47.27,14.63) 46.79,14.63 ; v1(47.27,14.63) 47.27,15.12 ; v1(31.5,73.56) 31.5,74.04 ; v1(31.5,73.56) 31.02,73.56 ; v1(31.5,73.56) 31.99,73.56 ; v1(31.5,73.56) 31.5,73.08 ; v1(41.27,14.63) 41.27,15.12 ; v1(41.27,14.63) 41.76,14.63 ; v1(41.27,14.63) 41.27,14.15 ; v1(41.27,14.63) 40.79,14.63 ; v1(39.27,12.63) 39.27,13.12 ; v1(39.27,12.63) 38.79,12.63 ; v1(39.27,12.63) 39.27,12.15 ; v1(39.27,12.63) 39.76,12.63 ; 16.03,9.6 v1(16.52,9.6) ; v1(16.52,9.6) 16.52,10.09 ; v1(16.52,9.6) 17,9.6 ; v1(16.52,9.6) 16.52,9.12 ; 61.03,21.7 v1(61.51,21.7) ; v1(61.51,21.7) 61.51,21.22 ; v1(61.51,21.7) 62,21.7 ; v1(61.51,21.7) 61.51,22.18 ; 67.03,13.7 v1(67.51,13.7) ; v1(67.51,13.7) 67.51,14.18 ; v1(67.51,13.7) 68,13.7 ; v1(67.51,13.7) 67.51,13.22 ; 41.27,12.15 v1(41.27,12.63) ; v1(41.27,12.63) 40.79,12.63 ; v1(41.27,12.63) 41.76,12.63 ; v1(41.27,12.63) 41.27,13.12 ; 38.79,6.63 v1(39.27,6.63) ; v1(39.27,6.63) 39.27,7.12 ; v1(39.27,6.63) 39.76,6.63 ; v1(39.27,6.63) 39.27,6.15 ; 54.83,4.9 J12.6 ; J12.6 55.63,5.7 ; J12.6 54.83,6.5 ; J12.6 54.33,6.2 J12.5 ; 57.03,17.7 v1(57.51,17.7) ; v1(57.51,17.7) 57.51,18.18 ; v1(57.51,17.7) 57.51,17.22 ; v1(57.51,17.7) 58,17.7 ; v1(55.5,73.56) 55.5,74.04 ; v1(55.5,73.56) 55.02,73.56 ; v1(55.5,73.56) 55.5,73.08 ; v1(55.5,73.56) 55.99,73.56 ; 8.27,59.1 C34.2 ; C34.2 9.53,59.1 ; C34.2 8.9,58.5 ; C34.2 8.9,59.7 ; 6.03,11.6 v1(6.52,11.6) ; v1(6.52,11.6) 6.52,11.12 ; v1(6.52,11.6) 7,11.6 ; v1(6.52,11.6) 6.52,12.09 ; 51.5,75.08 v1(51.5,75.56) ; v1(51.5,75.56) 51.99,75.56 ; v1(51.5,75.56) 51.02,75.56 ; v1(51.5,75.56) 51.5,76.04 ; 9.5,73.08 v1(9.5,73.56) ; v1(9.5,73.56) 9.99,73.56 ; v1(9.5,73.56) 9.02,73.56 ; v1(9.5,73.56) 9.5,74.04 ; 24.82,62.52 v1(25.3,62.52) ; v1(25.3,62.52) 25.79,62.52 ; v1(25.3,62.52) 25.3,63 ; v1(25.3,62.52) 25.3,62.03 ; 61.51,23.22 v1(61.51,23.7) ; v1(61.51,23.7) 62,23.7 ; v1(61.51,23.7) 61.51,24.18 ; v1(61.51,23.7) 61.03,23.7 ; v1(57.51,7.7) 57.51,8.18 ; v1(57.51,7.7) 57.51,7.22 ; v1(57.51,7.7) 57.03,7.7 ; v1(57.51,7.7) 58,7.7 ; 63.51,13.22 v1(63.51,13.7) ; v1(63.51,13.7) 64,13.7 ; v1(63.51,13.7) 63.03,13.7 ; v1(63.51,13.7) 63.51,14.18 ; 60.43,38.1 R21.2 59.7,38.7 ; 34.65,34.35 v1(34.65,34.84) ; v1(34.65,34.84) 34.65,35.32 ; v1(34.65,34.84) 34.17,34.84 ; v1(34.65,34.84) 35.13,34.84 ; 12.03,7.6 v1(12.52,7.6) ; v1(12.52,7.6) 12.52,7.12 ; v1(12.52,7.6) 12.52,8.09 ; v1(12.52,7.6) 13,7.6 ; 57.85,31.02 J11.6 ; J11.6 59.38,31.95 ; J11.6 57.85,32.88 ; J11.6 56.32,31.95 ; L5.2 37.35,11.5 ; L5.2 36.9,11.93 ; L5.2 36.9,11.07 ; 46.79,10.63 v1(47.27,10.63) ; v1(47.27,10.63) 47.76,10.63 ; v1(47.27,10.63) 47.27,10.15 ; v1(47.27,10.63) 47.27,11.12 ; 21.5,75.08 v1(21.5,75.56) ; v1(21.5,75.56) 21.02,75.56 ; v1(21.5,75.56) 21.99,75.56 ; v1(21.5,75.56) 21.5,76.04 ; v1(43.27,6.63) 43.76,6.63 ; v1(43.27,6.63) 42.79,6.63 ; v1(43.27,6.63) 43.27,6.15 ; v1(43.27,6.63) 43.27,7.12 ; 36.44,54.81 v1(36.92,54.81) ; v1(36.92,54.81) 37.41,54.81 ; v1(36.92,54.81) 36.92,55.29 ; v1(36.92,54.81) 36.92,54.33 ; v1(29.5,73.56) 29.5,74.04 ; v1(29.5,73.56) 29.02,73.56 ; v1(29.5,73.56) 29.99,73.56 ; v1(29.5,73.56) 29.5,73.08 ; 57.02,75.56 v1(57.5,75.56) ; v1(57.5,75.56) 57.5,76.04 ; v1(57.5,75.56) 57.5,75.08 ; v1(57.5,75.56) 57.99,75.56 ; 25.02,75.56 v1(25.5,75.56) ; v1(25.5,75.56) 25.99,75.56 ; v1(25.5,75.56) 25.5,76.04 ; v1(25.5,75.56) 25.5,75.08 ; SW2.2 69.83,62.6 ; SW2.2 69.05,63.23 ; SW2.2 69.05,61.97 ; v1(39.52,40.08) 39.52,40.56 ; v1(39.52,40.08) 40,40.08 ; v1(39.52,40.08) 39.52,39.6 ; v1(39.52,40.08) 39.03,40.08 ; v1(20.35,32.2) 22.45,32.2 22.63,32.38 C9.2 ; 12.52,11.12 v1(12.52,11.6) ; v1(12.52,11.6) 13,11.6 ; v1(12.52,11.6) 12.03,11.6 ; v1(12.52,11.6) 12.52,12.09 ; 65.03,13.7 v1(65.51,13.7) ; v1(65.51,13.7) 66,13.7 ; v1(65.51,13.7) 65.51,13.22 ; v1(65.51,13.7) 65.51,14.18 ; 37.5,75.08 v1(37.5,75.56) ; v1(37.5,75.56) 37.99,75.56 ; v1(37.5,75.56) 37.5,76.04 ; v1(37.5,75.56) 37.02,75.56 ; v1(41.27,2.63) 41.27,3.12 ; v1(41.27,2.63) 41.76,2.63 ; v1(41.27,2.63) 40.79,2.63 ; v1(41.27,2.63) 41.27,2.15 ; J12.9 48.8,4.23 ; J12.9 49.53,2.9 ; J12.9 48.8,1.57 ; J12.9 48.07,2.9 ; 13.02,75.56 v1(13.5,75.56) ; v1(13.5,75.56) 13.5,75.08 ; v1(13.5,75.56) 13.5,76.04 ; v1(13.5,75.56) 13.99,75.56 ; v1(43.27,10.63) 43.27,11.12 ; v1(43.27,10.63) 42.79,10.63 ; v1(43.27,10.63) 43.76,10.63 ; v1(43.27,10.63) 43.27,10.15 ; 27.9,5.13 J4.15 27.9,3.27 ; v1(63.51,23.7) 64,23.7 ; v1(63.51,23.7) 63.03,23.7 ; v1(63.51,23.7) 63.51,24.18 ; v1(63.51,23.7) 63.51,23.22 ; 59.5,73.08 v1(59.5,73.56) ; v1(59.5,73.56) 59.99,73.56 ; v1(59.5,73.56) 59.5,74.04 ; v1(59.5,73.56) 59.02,73.56 ; v1(31.04,54.78) 31.52,54.78 ; v1(31.04,54.78) 31.04,55.27 ; v1(31.04,54.78) 31.04,54.3 ; v1(31.04,54.78) 30.56,54.78 ; R9.2 11,46.08 ; R9.2 11.45,45.6 ; R9.2 11.02,45.58 11.47,45.58 11.49,45.6 R8.2 R7.2 13.36,45.6 13.38,45.58 13.82,45.58 R6.2 ; R9.2 10.55,45.6 ; R9.2 10.75,45.35 9.8,45.35 ; 36.65,32.35 v1(36.65,32.84) ; v1(36.65,32.84) 36.17,32.84 ; v1(36.65,32.84) 36.65,33.32 ; v1(36.65,32.84) 37.13,32.84 ; v1(47.27,8.63) 47.27,9.12 ; v1(47.27,8.63) 46.79,8.63 ; v1(47.27,8.63) 47.76,8.63 ; v1(47.27,8.63) 47.27,8.15 ; 61.03,19.7 v1(61.51,19.7) ; v1(61.51,19.7) 61.51,20.18 ; v1(61.51,19.7) 61.51,19.22 ; v1(61.51,19.7) 62,19.7 ; v1(42.92,54.81) 42.92,55.29 ; v1(42.92,54.81) 43.41,54.81 ; v1(42.92,54.81) 42.44,54.81 ; v1(42.92,54.81) 42.92,54.33 ; 4.52,7.12 v1(4.52,7.6) ; v1(4.52,7.6) 4.52,8.09 ; v1(4.52,7.6) 4.03,7.6 ; v1(4.52,7.6) 5,7.6 ; v1(57.51,15.7) 58,15.7 ; v1(57.51,15.7) 57.51,15.22 ; v1(57.51,15.7) 57.51,16.18 ; v1(57.51,15.7) 57.03,15.7 ; U8.1 56.13,65.05 ; U8.1 55.07,65.05 ; U8.1 55.6,63.87 ; U8.1 55.6,66.23 ; 23.5,73.08 v1(23.5,73.56) ; v1(23.5,73.56) 23.02,73.56 ; v1(23.5,73.56) 23.5,74.04 ; v1(23.5,73.56) 23.99,73.56 ; v1(36.65,36.84) 37.13,36.84 ; v1(36.65,36.84) 36.17,36.84 ; v1(36.65,36.84) 36.65,37.32 ; v1(36.65,36.84) 36.65,36.35 ; v1(63.51,7.7) 63.51,8.18 ; v1(63.51,7.7) 63.03,7.7 ; v1(63.51,7.7) 64,7.7 ; v1(63.51,7.7) 63.51,7.22 ; v1(57.51,19.7) 57.51,20.18 ; v1(57.51,19.7) 57.03,19.7 ; v1(57.51,19.7) 58,19.7 ; v1(57.51,19.7) 57.51,19.22 ; C3.2 25.15,50.4 ; C3.2 24.7,49.97 ; C3.2 25.18,49.97 25.75,50.55 30.35,50.55 30.93,49.97 C2.2 C23.2 ; v1(27.3,60.52) 27.3,61 ; v1(27.3,60.52) 27.79,60.52 ; v1(27.3,60.52) 27.3,60.03 ; v1(27.3,60.52) 26.82,60.52 ; v1(41.27,0.63) 41.27,1.12 ; v1(41.27,0.63) 41.76,0.63 ; v1(41.27,0.63) 41.27,0.15 ; v1(41.27,0.63) 40.79,0.63 ; 61.03,13.7 v1(61.51,13.7) ; v1(61.51,13.7) 61.51,14.18 ; v1(61.51,13.7) 62,13.7 ; v1(61.51,13.7) 61.51,13.22 ; 44.79,2.63 v1(45.27,2.63) ; v1(45.27,2.63) 45.27,3.12 ; v1(45.27,2.63) 45.76,2.63 ; v1(45.27,2.63) 45.27,2.15 ; C51.2 37.2,60 v1(36.9,59.7) ; C51.2 C52.2 ; C51.2 37.83,61.2 ; C51.2 36.57,61.2 ; 12.03,58.91 v1(12.03,59.39) ; v1(12.03,59.39) 11.55,59.39 ; v1(12.03,59.39) 12.03,59.88 ; v1(12.03,59.39) 12.52,59.39 ; 9.22,45.4 C28.2 ; C28.2 10.48,45.4 ; C28.2 9.85,44.8 ; C28.2 9.8,45.35 ; C28.2 9.85,46 ; 38.79,4.63 v1(39.27,4.63) ; v1(39.27,4.63) 39.27,5.12 ; v1(39.27,4.63) 39.27,4.15 ; v1(39.27,4.63) 39.76,4.63 ; 44.79,6.63 v1(45.27,6.63) ; v1(45.27,6.63) 45.76,6.63 ; v1(45.27,6.63) 45.27,6.15 ; v1(45.27,6.63) 45.27,7.12 ; 47.02,73.56 v1(47.5,73.56) ; v1(47.5,73.56) 47.5,74.04 ; v1(47.5,73.56) 47.5,73.08 ; v1(47.5,73.56) 47.99,73.56 ; v1(41.5,75.56) 41.99,75.56 ; v1(41.5,75.56) 41.5,76.04 ; v1(41.5,75.56) 41.5,75.08 ; v1(41.5,75.56) 41.02,75.56 ; v1(33.04,52.78) 33.52,52.78 ; v1(33.04,52.78) 32.56,52.78 ; v1(33.04,52.78) 33.04,53.27 ; v1(33.04,52.78) 33.04,52.3 ; 67.03,9.7 v1(67.51,9.7) ; v1(67.51,9.7) 67.51,9.22 ; v1(67.51,9.7) 68,9.7 ; v1(67.51,9.7) 67.51,10.18 ; v1(43.27,14.63) 43.76,14.63 ; v1(43.27,14.63) 43.27,14.15 ; v1(43.27,14.63) 42.79,14.63 ; v1(43.27,14.63) 43.27,15.12 ; v1(31.04,56.78) 31.04,57.27 ; v1(31.04,56.78) 30.56,56.78 ; v1(31.04,56.78) 31.04,56.3 ; v1(31.04,56.78) 31.52,56.78 ; J12.5 53.69,7 ; J12.5 53.69,5.4 ; 63.03,21.7 v1(63.51,21.7) ; v1(63.51,21.7) 64,21.7 ; v1(63.51,21.7) 63.51,22.18 ; v1(63.51,21.7) 63.51,21.22 ; v1(18.52,7.6) 19,7.6 ; v1(18.52,7.6) 18.03,7.6 ; v1(18.52,7.6) 18.52,7.12 ; v1(18.52,7.6) 18.52,8.09 ; v1(42.7,44.04) 42.95,43.79 U1.64 ; v1(42.7,44.04) 43.19,44.04 ; v1(42.7,44.04) 42.7,44.52 ; 15.55,57.39 v1(16.03,57.39) ; v1(16.03,57.39) 16.03,56.91 ; v1(16.03,57.39) 16.03,57.88 ; v1(16.03,57.39) 16.52,57.39 ; v1(59.51,21.7) 59.51,22.18 ; v1(59.51,21.7) 59.03,21.7 ; v1(59.51,21.7) 60,21.7 ; v1(59.51,21.7) 59.51,21.22 ; 47.27,0.15 v1(47.27,0.63) ; v1(47.27,0.63) 47.76,0.63 ; v1(47.27,0.63) 46.79,0.63 ; v1(47.27,0.63) 47.27,1.12 ; 43.02,73.56 v1(43.5,73.56) ; v1(43.5,73.56) 43.5,73.08 ; v1(43.5,73.56) 43.99,73.56 ; v1(43.5,73.56) 43.5,74.04 ; 67.03,11.7 v1(67.51,11.7) ; v1(67.51,11.7) 67.51,12.18 ; v1(67.51,11.7) 68,11.7 ; v1(67.51,11.7) 67.51,11.22 ; v1(34.65,32.84) 35.13,32.84 ; v1(34.65,32.84) 34.65,33.32 ; v1(34.65,32.84) 34.65,32.35 ; v1(34.65,32.84) 34.17,32.84 ; v1(33.04,54.78) 33.52,54.78 ; v1(33.04,54.78) 32.56,54.78 ; v1(33.04,54.78) 33.04,55.27 ; v1(33.04,54.78) 33.04,54.3 ; v1(67.51,21.7) 67.51,22.18 ; v1(67.51,21.7) 67.03,21.7 ; v1(67.51,21.7) 67.51,21.22 ; v1(67.51,21.7) 68,21.7 ; 46.79,2.63 v1(47.27,2.63) ; v1(47.27,2.63) 47.76,2.63 ; v1(47.27,2.63) 47.27,2.15 ; v1(47.27,2.63) 47.27,3.12 ; 59.5,75.08 v1(59.5,75.56) ; v1(59.5,75.56) 59.99,75.56 ; v1(59.5,75.56) 59.5,76.04 ; v1(59.5,75.56) 59.02,75.56 ; 43.5,75.08 v1(43.5,75.56) ; v1(43.5,75.56) 43.99,75.56 ; v1(43.5,75.56) 43.02,75.56 ; v1(43.5,75.56) 43.5,76.04 ; U4.11 7.73,55.9 ; U4.11 6.88,55.9 ; U4.11 7.3,55.06 7.35,55.01 7.35,54.95 7.65,54.65 9.65,54.65 9.84,54.84 U4.9 ; v1(38.55,19.65) 39.33,20.43 C4.2 ; 59.03,19.7 v1(59.51,19.7) ; v1(59.51,19.7) 59.51,19.22 ; v1(59.51,19.7) 59.51,20.18 ; v1(59.51,19.7) 60,19.7 ; 61.51,7.22 v1(61.51,7.7) ; v1(61.51,7.7) 61.51,8.18 ; v1(61.51,7.7) 61.03,7.7 ; v1(61.51,7.7) 62,7.7 ; v1(41.27,10.63) 41.27,11.12 ; v1(41.27,10.63) 40.79,10.63 ; v1(41.27,10.63) 41.76,10.63 ; v1(41.27,10.63) 41.27,10.15 ; v1(59.51,23.7) 59.51,24.18 ; v1(59.51,23.7) 60,23.7 ; v1(59.51,23.7) 59.03,23.7 ; v1(59.51,23.7) 59.51,23.22 ; 47.5,75.08 v1(47.5,75.56) ; v1(47.5,75.56) 47.02,75.56 ; v1(47.5,75.56) 47.99,75.56 ; v1(47.5,75.56) 47.5,76.04 ; 63.03,19.7 v1(63.51,19.7) ; v1(63.51,19.7) 63.51,20.18 ; v1(63.51,19.7) 63.51,19.22 ; v1(63.51,19.7) 64,19.7 ; v1(39.27,2.63) 39.76,2.63 ; v1(39.27,2.63) 38.79,2.63 ; v1(39.27,2.63) 39.27,3.12 ; v1(39.27,2.63) 39.27,2.15 ; v1(37.5,73.56) 37.5,74.04 ; v1(37.5,73.56) 37.02,73.56 ; v1(37.5,73.56) 37.5,73.08 ; v1(37.5,73.56) 37.99,73.56 ; v1(29.5,75.56) 29.99,75.56 ; v1(29.5,75.56) 29.5,75.08 ; v1(29.5,75.56) 29.5,76.04 ; v1(29.5,75.56) 29.02,75.56 ; 67.03,19.7 v1(67.51,19.7) ; v1(67.51,19.7) 67.51,19.22 ; v1(67.51,19.7) 68,19.7 ; v1(67.51,19.7) 67.51,20.18 ; v1(49.5,73.56) 49.5,74.04 ; v1(49.5,73.56) 49.02,73.56 ; v1(49.5,73.56) 49.99,73.56 ; v1(49.5,73.56) 49.5,73.08 ; v1(19.5,75.56) 19.5,76.04 ; v1(19.5,75.56) 19.02,75.56 ; v1(19.5,75.56) 19.5,75.08 ; v1(19.5,75.56) 19.99,75.56 ; 13.5,73.08 v1(13.5,73.56) ; v1(13.5,73.56) 13.02,73.56 ; v1(13.5,73.56) 13.99,73.56 ; v1(13.5,73.56) 13.5,74.04 ; v1(4.52,9.6) 5,9.6 ; v1(4.52,9.6) 4.52,10.09 ; v1(4.52,9.6) 4.52,9.12 ; v1(4.52,9.6) 4.03,9.6 ; 36.65,30.35 v1(36.65,30.84) ; v1(36.65,30.84) 36.17,30.84 ; v1(36.65,30.84) 36.65,31.32 ; v1(36.65,30.84) 37.13,30.84 ; 0.52,9.12 v1(0.52,9.6) ; v1(0.52,9.6) 1,9.6 ; v1(0.52,9.6) 0.52,10.09 ; v1(51.5,73.56) 51.5,74.04 ; v1(51.5,73.56) 51.5,73.08 ; v1(51.5,73.56) 51.99,73.56 ; v1(51.5,73.56) 51.02,73.56 ; 9.8,45.35 9.8,45.25 9.35,44.8 U2.36 ; v1(35.5,73.56) 35.5,74.04 ; v1(35.5,73.56) 35.5,73.08 ; v1(35.5,73.56) 35.02,73.56 ; v1(35.5,73.56) 35.99,73.56 ; 31.04,52.3 v1(31.04,52.78) ; v1(31.04,52.78) 31.04,53.27 ; v1(31.04,52.78) 31.52,52.78 ; v1(31.04,52.78) 30.56,52.78 ; v1(2.52,11.6) 3,11.6 ; v1(2.52,11.6) 2.52,11.12 ; v1(2.52,11.6) 2.03,11.6 ; v1(2.52,11.6) 2.52,12.09 ; v1(49.5,75.56) 49.5,76.04 ; v1(49.5,75.56) 49.99,75.56 ; v1(49.5,75.56) 49.5,75.08 ; v1(49.5,75.56) 49.02,75.56 ; v1(14.03,59.39) 14.03,59.88 ; v1(14.03,59.39) 13.55,59.39 ; v1(14.03,59.39) 14.52,59.39 ; v1(14.03,59.39) 14.03,58.91 ; v1(63.51,15.7) 64,15.7 ; v1(63.51,15.7) 63.51,16.18 ; v1(63.51,15.7) 63.03,15.7 ; v1(63.51,15.7) 63.51,15.22 ; 23.3,62.03 v1(23.3,62.52) ; v1(23.3,62.52) 23.3,63 ; v1(23.3,62.52) 22.82,62.52 ; v1(23.3,62.52) 23.79,62.52 ; 34.65,30.35 v1(34.65,30.84) ; v1(34.65,30.84) 34.65,31.32 ; v1(34.65,30.84) 35.13,30.84 ; v1(34.65,30.84) 34.17,30.84 ; v1(47.27,12.63) 47.27,13.12 ; v1(47.27,12.63) 47.27,12.15 ; v1(47.27,12.63) 46.79,12.63 ; v1(47.27,12.63) 47.76,12.63 ; C52.2 37.83,62.6 ; C52.2 36.57,62.6 ; 15.02,75.56 v1(15.5,75.56) ; v1(15.5,75.56) 15.5,76.04 ; v1(15.5,75.56) 15.99,75.56 ; v1(15.5,75.56) 15.5,75.08 ; 35.52,39.6 v1(35.52,40.08) ; v1(35.52,40.08) 35.03,40.08 ; v1(35.52,40.08) 35.52,40.56 ; v1(35.52,40.08) 36,40.08 ; 0.52,7.12 v1(0.52,7.6) ; v1(0.52,7.6) 0.52,8.09 ; v1(0.52,7.6) 1,7.6 ; R22.2 62.98,28.45 ; R22.2 62.25,29.05 ; R22.2 62.25,27.85 ; v1(59.51,7.7) 60,7.7 ; v1(59.51,7.7) 59.51,7.22 ; v1(59.51,7.7) 59.51,8.18 ; v1(59.51,7.7) 59.03,7.7 ; C4.2 39.33,21.5 ; C4.2 C5.2 ; v1(14.03,57.39) 14.52,57.39 ; v1(14.03,57.39) 14.03,57.88 ; v1(14.03,57.39) 14.03,56.91 ; v1(14.03,57.39) 13.55,57.39 ; 7.6,64.32 J10.2 ; J10.2 8.44,66.25 10.15,67.96 C61.2 ; J10.2 7.6,68.18 ; J10.2 6.77,66.25 ; 44.79,14.63 v1(45.27,14.63) ; v1(45.27,14.63) 45.27,15.12 ; v1(45.27,14.63) 45.27,14.15 ; v1(45.27,14.63) 45.76,14.63 ; v1(45.27,10.63) 45.76,10.63 ; v1(45.27,10.63) 45.27,10.15 ; v1(45.27,10.63) 45.27,11.12 ; v1(45.27,10.63) 44.79,10.63 ; 57.51,21.22 v1(57.51,21.7) ; v1(57.51,21.7) 58,21.7 ; v1(57.51,21.7) 57.03,21.7 ; v1(57.51,21.7) 57.51,22.18 ; 67.51,23.22 v1(67.51,23.7) ; v1(67.51,23.7) 67.03,23.7 ; v1(67.51,23.7) 68,23.7 ; v1(67.51,23.7) 67.51,24.18 ; 45.5,73.08 v1(45.5,73.56) ; v1(45.5,73.56) 45.5,74.04 ; v1(45.5,73.56) 45.02,73.56 ; v1(45.5,73.56) 45.99,73.56 ; v1(36.65,34.84) 37.13,34.84 ; v1(36.65,34.84) 36.65,35.32 ; v1(36.65,34.84) 36.17,34.84 ; v1(36.65,34.84) 36.65,34.35 ; v1(21.5,73.56) 21.5,74.04 ; v1(21.5,73.56) 21.02,73.56 ; v1(21.5,73.56) 21.99,73.56 ; 39.02,73.56 v1(39.5,73.56) ; v1(39.5,73.56) 39.5,74.04 ; v1(39.5,73.56) 39.99,73.56 ; v1(39.5,73.56) 39.5,73.08 ; 6.52,7.12 v1(6.52,7.6) ; v1(6.52,7.6) 7,7.6 ; v1(6.52,7.6) 6.03,7.6 ; v1(6.52,7.6) 6.52,8.09 ; J11.4 51.35,30.13 ; J11.4 51.35,28.27 ; J11.4 50.42,29.2 ; J11.4 52.28,29.2 ; 14.9,53 L13.2 ; L13.2 15.35,53.43 ; L13.2 15.8,53 ; L13.2 15.35,52.57 ; 18.52,9.12 v1(18.52,9.6) ; v1(18.52,9.6) 18.52,10.09 ; v1(18.52,9.6) 18.03,9.6 ; v1(18.52,9.6) 19,9.6 ; 31.02,75.56 v1(31.5,75.56) ; v1(31.5,75.56) 31.5,76.04 ; v1(31.5,75.56) 31.5,75.08 ; v1(31.5,75.56) 31.99,75.56 ; 57.03,9.7 v1(57.51,9.7) ; v1(57.51,9.7) 57.51,9.22 ; v1(57.51,9.7) 58,9.7 ; v1(57.51,9.7) 57.51,10.18 ; 9.02,75.56 v1(9.5,75.56) ; v1(9.5,75.56) 9.5,75.08 ; v1(9.5,75.56) 9.99,75.56 ; v1(9.5,75.56) 9.5,76.04 ; v1(61.51,9.7) 61.51,10.18 ; v1(61.51,9.7) 61.03,9.7 ; v1(61.51,9.7) 61.51,9.22 ; v1(61.51,9.7) 62,9.7 ; 8.52,11.12 v1(8.52,11.6) ; v1(8.52,11.6) 8.52,12.09 ; v1(8.52,11.6) 9,11.6 ; v1(8.52,11.6) 8.03,11.6 ; v1(41.27,6.63) 41.76,6.63 ; v1(41.27,6.63) 41.27,7.12 ; v1(41.27,6.63) 40.79,6.63 ; v1(41.27,6.63) 41.27,6.15 ; v1(59.51,9.7) 60,9.7 ; v1(59.51,9.7) 59.51,9.22 ; v1(59.51,9.7) 59.51,10.18 ; v1(59.51,9.7) 59.03,9.7 ; 11.82,19.5 C31.1 ; C31.1 12.45,18.5 12.15,18.2 v1(9.35,18.2) 6.65,18.2 6.25,18.6 6.25,19.45 ; C31.1 12.45,20.1 ; C31.1 13.08,19.5 ; C41.1 13.4,52.65 ; C41.1 12.77,52.05 ; C41.1 14.03,52.05 ; C41.1 13.4,51.45 ; v1(33.5,75.56) 33.99,75.56 ; v1(33.5,75.56) 33.5,76.04 ; v1(33.5,75.56) 33.02,75.56 ; v1(33.5,75.56) 33.5,75.08 ; 47.27,6.15 v1(47.27,6.63) ; v1(47.27,6.63) 47.76,6.63 ; v1(47.27,6.63) 46.79,6.63 ; v1(47.27,6.63) 47.27,7.12 ; v1(45.5,75.56) 45.5,76.04 ; v1(45.5,75.56) 45.5,75.08 ; v1(45.5,75.56) 45.02,75.56 ; v1(45.5,75.56) 45.99,75.56 ; 1.8,55.9 U4.15 ; U4.15 2.65,55.9 ; U4.15 2.23,55.07 ; U4.15 2.23,56.73 ; U3.2 59.43,36.45 ; U3.2 59,35.77 ; U3.2 59,37.13 ; U3.2 58.57,36.45 ; 17.72,70.3 U9.1 18.5,70.78 ; R2.2 45.45,34.86 44.84,34.25 v1(44.1,34.25) ; 10.03,9.6 v1(10.52,9.6) ; v1(10.52,9.6) 10.52,9.12 ; v1(10.52,9.6) 10.52,10.09 ; v1(10.52,9.6) 11,9.6 ; v1(43.27,2.63) 43.76,2.63 ; v1(43.27,2.63) 43.27,3.12 ; v1(43.27,2.63) 43.27,2.15 ; v1(43.27,2.63) 42.79,2.63 ; v1(67.51,7.7) 67.51,8.18 ; v1(67.51,7.7) 67.51,7.22 ; v1(67.51,7.7) 67.03,7.7 ; v1(67.51,7.7) 68,7.7 ; v1(65.51,19.7) 65.51,20.18 ; v1(65.51,19.7) 65.03,19.7 ; v1(65.51,19.7) 65.51,19.22 ; v1(65.51,19.7) 66,19.7 ; 48,60.6 C54.2 ; C54.2 47.37,61.2 ; C54.2 C55.2 ; C54.2 48.63,61.2 ; v1(16.03,59.39) 16.52,59.39 ; v1(16.03,59.39) 16.03,59.88 ; v1(16.03,59.39) 16.03,58.91 ; v1(16.03,59.39) 15.55,59.39 ; C58.2 59.73,62.55 ; C58.2 58.47,62.55 ; C58.2 59.1,63.15 ; C58.2 C57.2 ; v1(45.27,0.63) 45.27,1.12 ; v1(45.27,0.63) 45.27,0.15 ; v1(45.27,0.63) 44.79,0.63 ; v1(45.27,0.63) 45.76,0.63 ; v1(38.92,54.81) 38.92,55.29 ; v1(38.92,54.81) 38.92,54.33 ; v1(38.92,54.81) 38.44,54.81 ; v1(38.92,54.81) 39.41,54.81 ; 16.52,7.12 v1(16.52,7.6) ; v1(16.52,7.6) 17,7.6 ; v1(16.52,7.6) 16.03,7.6 ; v1(16.52,7.6) 16.52,8.09 ; v1(27.3,56.52) 27.79,56.52 ; v1(27.3,56.52) 27.3,57 ; v1(27.3,56.52) 26.82,56.52 ; v1(27.3,56.52) 27.3,56.03 ; 14.03,11.6 v1(14.52,11.6) ; v1(14.52,11.6) 15,11.6 ; v1(14.52,11.6) 14.52,12.09 ; v1(14.52,11.6) 14.52,11.12 ; 65.51,7.22 v1(65.51,7.7) ; v1(65.51,7.7) 65.51,8.18 ; v1(65.51,7.7) 65.03,7.7 ; v1(65.51,7.7) 66,7.7 ; 43.27,0.15 v1(43.27,0.63) ; v1(43.27,0.63) 43.76,0.63 ; v1(43.27,0.63) 43.27,1.12 ; v1(43.27,0.63) 42.79,0.63 ; C26.2 C10.2 36.2,50.2 v1(35.65,50.75) ; 33.04,50.3 v1(33.04,50.78) ; v1(33.04,50.78) 32.56,50.78 ; v1(33.04,50.78) 33.52,50.78 ; v1(33.04,50.78) 33.04,51.27 ; v1(25.3,56.52) 25.3,57 ; v1(25.3,56.52) 25.79,56.52 ; v1(25.3,56.52) 24.82,56.52 ; v1(25.3,56.52) 25.3,56.03 ; v1(43.27,12.63) 43.76,12.63 ; v1(43.27,12.63) 42.79,12.63 ; v1(43.27,12.63) 43.27,12.15 ; v1(43.27,12.63) 43.27,13.12 ; v1(55.5,75.56) 55.5,76.04 ; v1(55.5,75.56) 55.5,75.08 ; v1(55.5,75.56) 55.02,75.56 ; v1(55.5,75.56) 55.99,75.56 ; SW2.3 68.28,66.6 ; SW2.3 67.45,67.35 ; SW2.3 66.62,66.6 ; SW2.3 67.45,65.85 ; 27.5,73.08 v1(27.5,73.56) ; v1(27.5,73.56) 27.02,73.56 ; v1(27.5,73.56) 27.5,74.04 ; v1(27.5,73.56) 27.99,73.56 ; 14.03,7.6 v1(14.52,7.6) ; v1(14.52,7.6) 14.52,7.12 ; v1(14.52,7.6) 14.52,8.09 ; v1(14.52,7.6) 15,7.6 ; C23.2 31.9,50.4 ; C23.2 32.35,49.97 ; 60.52,62.25 R5.2 ; R5.2 61,61.8 ; R5.2 61,62.7 ; v1(65.51,9.7) 65.51,10.18 ; v1(65.51,9.7) 65.03,9.7 ; v1(65.51,9.7) 66,9.7 ; v1(65.51,9.7) 65.51,9.22 ; R18.1 22.9,11.3 ; R18.1 21.7,11.3 ; R18.1 22.3,12.03 ; 57.85,25.52 J11.5 ; J11.5 56.32,26.45 ; J11.5 59.38,26.45 ; J11.5 57.85,27.38 ; C14.2 43.35,45.1 ; C14.2 42.92,45.55 ; C14.2 42.92,44.65 ; R38.1 23.8,66.7 ; R38.1 23.8,65.5 ; R38.1 23.9,66 23.9,65.48 23.7,65.28 C50.2 ; R38.1 23.07,66.1 ; 37.03,40.08 v1(37.52,40.08) ; v1(37.52,40.08) 37.52,40.56 ; v1(37.52,40.08) 38,40.08 ; v1(37.52,40.08) 37.52,39.6 ; v1(27.3,58.52) 27.79,58.52 ; v1(27.3,58.52) 27.3,59 ; v1(27.3,58.52) 26.82,58.52 ; v1(27.3,58.52) 27.3,58.03 ; v1(65.51,11.7) 66,11.7 ; v1(65.51,11.7) 65.03,11.7 ; v1(65.51,11.7) 65.51,11.22 ; v1(65.51,11.7) 65.51,12.18 ; v1(35.52,42.08) 36,42.08 ; v1(35.52,42.08) 35.52,42.56 ; v1(35.52,42.08) 35.52,41.6 ; v1(35.52,42.08) 35.03,42.08 ; 2.03,7.6 v1(2.52,7.6) ; v1(2.52,7.6) 2.52,7.12 ; v1(2.52,7.6) 3,7.6 ; v1(2.52,7.6) 2.52,8.09 ; 39.27,0.15 v1(39.27,0.63) ; v1(39.27,0.63) 39.27,1.12 ; v1(39.27,0.63) 38.79,0.63 ; v1(39.27,0.63) 39.76,0.63 ; 53.5,73.08 v1(53.5,73.56) ; v1(53.5,73.56) 53.99,73.56 ; v1(53.5,73.56) 53.5,74.04 ; v1(53.5,73.56) 53.02,73.56 ; 50.85,31.02 J11.8 ; J11.8 50.85,32.88 ; J11.8 49.32,31.95 ; J11.8 52.38,31.95 ; v1(17.5,75.56) 17.99,75.56 ; v1(17.5,75.56) 17.5,76.04 ; v1(17.5,75.56) 17.5,75.08 ; v1(17.5,75.56) 17.02,75.56 ; 8.52,9.12 v1(8.52,9.6) ; v1(8.52,9.6) 8.03,9.6 ; v1(8.52,9.6) 9,9.6 ; v1(8.52,9.6) 8.52,10.09 ; v1(23.3,60.52) 23.3,61 ; v1(23.3,60.52) 23.3,60.03 ; v1(23.3,60.52) 23.79,60.52 ; v1(23.3,60.52) 22.82,60.52 ; v1(67.51,17.7) 67.51,18.18 ; v1(67.51,17.7) 67.51,17.22 ; v1(67.51,17.7) 68,17.7 ; v1(67.51,17.7) 67.03,17.7 ; 44.79,12.63 v1(45.27,12.63) ; v1(45.27,12.63) 45.27,13.12 ; v1(45.27,12.63) 45.27,12.15 ; v1(45.27,12.63) 45.76,12.63 ; 57.03,13.7 v1(57.51,13.7) ; v1(57.51,13.7) 57.51,13.22 ; v1(57.51,13.7) 58,13.7 ; v1(57.51,13.7) 57.51,14.18 ; v1(16.52,11.6) 17,11.6 ; v1(16.52,11.6) 16.52,12.09 ; v1(16.52,11.6) 16.52,11.12 ; v1(16.52,11.6) 16.03,11.6 ; 47.27,4.15 v1(47.27,4.63) ; v1(47.27,4.63) 47.76,4.63 ; v1(47.27,4.63) 47.27,5.12 ; v1(47.27,4.63) 46.79,4.63 ; v1(11.5,75.56) 11.5,76.04 ; v1(11.5,75.56) 11.02,75.56 ; v1(11.5,75.56) 11.99,75.56 ; v1(11.5,75.56) 11.5,75.08 ; 20.03,9.6 v1(20.52,9.6) ; v1(20.52,9.6) 21,9.6 ; v1(20.52,9.6) 20.52,10.09 ; v1(20.52,9.6) 20.52,9.12 ; 65.51,21.22 v1(65.51,21.7) ; v1(65.51,21.7) 65.51,22.18 ; v1(65.51,21.7) 65.03,21.7 ; v1(65.51,21.7) 66,21.7 ; 2.23,49.07 U4.2 ; U4.2 2.65,49.9 ; U4.2 1.8,49.9 ; U4.2 2.23,50.73 ; 24.82,58.52 v1(25.3,58.52) ; v1(25.3,58.52) 25.3,58.03 ; v1(25.3,58.52) 25.3,59 ; v1(25.3,58.52) 25.79,58.52 ; v1(39.27,8.63) 39.27,9.12 ; v1(39.27,8.63) 38.79,8.63 ; v1(39.27,8.63) 39.27,8.15 ; v1(39.27,8.63) 39.76,8.63 ; v1(37.52,42.08) 37.52,42.56 ; v1(37.52,42.08) 37.03,42.08 ; v1(37.52,42.08) 37.52,41.6 ; v1(37.52,42.08) 38,42.08 ; 39.2,24.4 C18.2 ; C18.2 38.7,24.83 ; C18.2 39.65,24.83 ; 23.07,64.65 C50.2 ; C50.2 23.7,64.05 ; C50.2 24.33,64.65 ; 53.02,75.56 v1(53.5,75.56) ; v1(53.5,75.56) 53.5,76.04 ; v1(53.5,75.56) 53.99,75.56 ; v1(53.5,75.56) 53.5,75.08 ; v1(11.5,73.56) 11.5,74.04 ; v1(11.5,73.56) 11.5,73.08 ; v1(11.5,73.56) 11.99,73.56 ; v1(11.5,73.56) 11.02,73.56 ; 35.5,75.08 v1(35.5,75.56) ; v1(35.5,75.56) 35.5,76.04 ; v1(35.5,75.56) 35.02,75.56 ; v1(35.5,75.56) 35.99,75.56 ; 14.52,9.12 v1(14.52,9.6) ; v1(14.52,9.6) 14.03,9.6 ; v1(14.52,9.6) 14.52,10.09 ; v1(14.52,9.6) 15,9.6 ; 39.52,41.6 v1(39.52,42.08) ; v1(39.52,42.08) 39.52,42.56 ; v1(39.52,42.08) 40,42.08 ; v1(39.52,42.08) 39.03,42.08 ; v1(44.92,54.81) 45.41,54.81 ; v1(44.92,54.81) 44.92,55.29 ; v1(44.92,54.81) 44.44,54.81 ; v1(44.92,54.81) 44.92,54.33 ; 57.03,11.7 v1(57.51,11.7) ; v1(57.51,11.7) 57.51,12.18 ; v1(57.51,11.7) 57.51,11.22 ; v1(57.51,11.7) 58,11.7 ; 20.52,7.12 v1(20.52,7.6) ; v1(20.52,7.6) 21,7.6 ; v1(20.52,7.6) 20.03,7.6 ; v1(20.52,7.6) 20.52,8.09 ; 47.37,62.6 C55.2 ; C55.2 48.63,62.6 ; 43.27,8.15 v1(43.27,8.63) ; v1(43.27,8.63) 42.79,8.63 ; v1(43.27,8.63) 43.27,9.12 ; v1(43.27,8.63) 43.76,8.63 ; v1(31.04,50.78) 31.04,51.27 ; v1(31.04,50.78) 30.56,50.78 ; v1(31.04,50.78) 31.52,50.78 ; v1(23.3,56.52) 23.79,56.52 ; v1(23.3,56.52) 23.3,57 ; v1(23.3,56.52) 23.3,56.03 ; 44.79,8.63 v1(45.27,8.63) ; v1(45.27,8.63) 45.27,8.15 ; v1(45.27,8.63) 45.76,8.63 ; v1(45.27,8.63) 45.27,9.12 ; 33.04,56.3 v1(33.04,56.78) ; v1(33.04,56.78) 32.56,56.78 ; v1(33.04,56.78) 33.04,57.27 ; v1(33.04,56.78) 33.52,56.78 ; 8.52,7.12 v1(8.52,7.6) ; v1(8.52,7.6) 8.52,8.09 ; v1(8.52,7.6) 9,7.6 ; v1(8.52,7.6) 8.03,7.6 ; 68.27,59.7 C15.2 ; C15.2 68.7,60.15 ; C15.2 68.27,60.6 ; 10.52,11.12 v1(10.52,11.6) ; v1(10.52,11.6) 11,11.6 ; v1(10.52,11.6) 10.52,12.09 ; v1(10.52,11.6) 10.03,11.6 ; 57.02,73.56 v1(57.5,73.56) ; v1(57.5,73.56) 57.5,73.08 ; v1(57.5,73.56) 57.99,73.56 ; v1(57.5,73.56) 57.5,74.04 ; 23.02,75.56 v1(23.5,75.56) ; v1(23.5,75.56) 23.99,75.56 ; v1(23.5,75.56) 23.5,75.08 ; v1(23.5,75.56) 23.5,76.04 ; 43.27,26.7 L3.2 ; L3.2 v1(43.7,25.95) ; L3.2 44.13,26.7 ; v1(10.52,7.6) 10.52,8.09 ; v1(10.52,7.6) 11,7.6 ; v1(10.52,7.6) 10.52,7.12 ; v1(10.52,7.6) 10.03,7.6 ; v1(63.51,9.7) 64,9.7 ; v1(63.51,9.7) 63.51,10.18 ; v1(63.51,9.7) 63.51,9.22 ; v1(63.51,9.7) 63.03,9.7 ; C63.2 61.8,27.2 ; C63.2 61.37,26.75 ; C63.2 61.37,27.65 ; 41.27,4.15 v1(41.27,4.63) ; v1(41.27,4.63) 41.27,5.12 ; v1(41.27,4.63) 40.79,4.63 ; v1(41.27,4.63) 41.76,4.63 ; v1(41.27,8.63) 41.76,8.63 ; v1(41.27,8.63) 41.27,8.15 ; v1(41.27,8.63) 41.27,9.12 ; v1(41.27,8.63) 40.79,8.63 ; 6.03,9.6 v1(6.52,9.6) ; v1(6.52,9.6) 6.52,9.12 ; v1(6.52,9.6) 7,9.6 ; v1(6.52,9.6) 6.52,10.09 ; SW1.3 68.33,73.1 ; SW1.3 66.67,73.1 ; SW1.3 67.5,73.85 ; SW1.3 67.5,72.35 ; SW2.1 69.05,67.83 ; SW2.1 69.05,66.57 ; SW2.1 69.83,67.2 ; 12.03,9.6 v1(12.52,9.6) ; v1(12.52,9.6) 13,9.6 ; v1(12.52,9.6) 12.52,9.12 ; v1(12.52,9.6) 12.52,10.09 ; v1(67.51,15.7) 68,15.7 ; v1(67.51,15.7) 67.51,15.22 ; v1(67.51,15.7) 67.51,16.18 ; v1(67.51,15.7) 67.03,15.7 ; 15.02,73.56 v1(15.5,73.56) ; v1(15.5,73.56) 15.99,73.56 ; v1(15.5,73.56) 15.5,74.04 ; C33.2 62.98,29.85 ; C33.2 61.72,29.85 ; C33.2 62.35,29.25 ; v1(45.27,4.63) 45.27,5.12 ; v1(45.27,4.63) 45.27,4.15 ; v1(45.27,4.63) 45.76,4.63 ; v1(45.27,4.63) 44.79,4.63 ; 61.03,17.7 v1(61.51,17.7) ; v1(61.51,17.7) 62,17.7 ; v1(61.51,17.7) 61.51,18.18 ; v1(61.51,17.7) 61.51,17.22 ; 63.51,17.22 v1(63.51,17.7) ; v1(63.51,17.7) 64,17.7 ; v1(63.51,17.7) 63.51,18.18 ; v1(63.51,17.7) 63.03,17.7 ; v1(23.3,58.52) 23.3,59 ; v1(23.3,58.52) 23.79,58.52 ; v1(23.3,58.52) 23.3,58.03 ; v1(23.3,58.52) 22.82,58.52 ; v1(19.5,73.56) 19.5,74.04 ; v1(19.5,73.56) 19.99,73.56 ; v1(19.5,73.56) 19.02,73.56 ; 44.6,63.82 U7.1 ; U7.1 45.13,65 ; U7.1 44.07,65 ; U7.1 44.6,66.18 ; 39.27,14.15 v1(39.27,14.63) ; v1(39.27,14.63) 39.27,15.12 ; v1(39.27,14.63) 39.76,14.63 ; v1(39.27,14.63) 38.79,14.63 ; 27.3,62.03 v1(27.3,62.52) ; v1(27.3,62.52) 26.82,62.52 ; v1(27.3,62.52) 27.3,63 ; v1(27.3,62.52) 27.79,62.52 ; C61.2 10.78,72.15 ; C61.2 10.15,72.93 ; C61.2 9.52,72.15 ; 38.7,24.83 38.7,24.38 38.83,24.25 v1(40.95,24.25) ; 38.7,24.83 C21.2 ; 39.27,10.15 v1(39.27,10.63) ; v1(39.27,10.63) 39.76,10.63 ; v1(39.27,10.63) 38.79,10.63 ; v1(39.27,10.63) 39.27,11.12 ; SW1.2 69.88,69.1 ; SW1.2 69.1,69.73 ; SW1.2 69.1,68.47 ; R6.2 14.3,45.6 ; R6.2 13.4,45.6 ; R6.2 13.4,46.05 C36.2 ; R6.2 13.85,46.08 ; 18.03,11.6 v1(18.52,11.6) ; v1(18.52,11.6) 19,11.6 ; v1(18.52,11.6) 18.52,12.09 ; v1(18.52,11.6) 18.52,11.12 ; 2.52,9.12 v1(2.52,9.6) ; v1(2.52,9.6) 2.52,10.09 ; v1(2.52,9.6) 2.03,9.6 ; v1(2.52,9.6) 3,9.6 ; 39.5,75.08 v1(39.5,75.56) ; v1(39.5,75.56) 39.02,75.56 ; v1(39.5,75.56) 39.99,75.56 ; v1(39.5,75.56) 39.5,76.04 ; v1(41.5,73.56) 41.5,74.04 ; v1(41.5,73.56) 41.02,73.56 ; v1(41.5,73.56) 41.99,73.56 ; v1(41.5,73.56) 41.5,73.08 ; 55.27,2.9 J12.8 ; J12.8 56,1.57 ; J12.8 56.73,2.9 ; J12.8 56,4.23 ; 17.02,73.56 v1(17.5,73.56) ; v1(17.5,73.56) 17.5,74.04 ; v1(17.5,73.56) 17.99,73.56 ; v1(57.51,23.7) 58,23.7 ; v1(57.51,23.7) 57.51,24.18 ; v1(57.51,23.7) 57.51,23.22 ; v1(57.51,23.7) 57.03,23.7 ; J7.3 18.53,40.72 ; J7.3 17.55,41.7 ; J7.3 17.55,39.74 ; J7.3 16.57,40.72 ; v1(65.51,23.7) 66,23.7 ; v1(65.51,23.7) 65.03,23.7 ; v1(65.51,23.7) 65.51,23.22 ; v1(65.51,23.7) 65.51,24.18 ; v1(65.51,15.7) 65.51,16.18 ; v1(65.51,15.7) 65.51,15.22 ; v1(65.51,15.7) 65.03,15.7 ; v1(65.51,15.7) 66,15.7 ; 11.55,57.39 v1(12.03,57.39) ; v1(12.03,57.39) 12.03,57.88 ; v1(12.03,57.39) 12.52,57.39 ; 34.65,36.35 v1(34.65,36.84) ; v1(34.65,36.84) 34.17,36.84 ; v1(34.65,36.84) 34.65,37.32 ; v1(34.65,36.84) 35.13,36.84 ; 42.79,4.63 v1(43.27,4.63) ; v1(43.27,4.63) 43.27,4.15 ; v1(43.27,4.63) 43.76,4.63 ; v1(43.27,4.63) 43.27,5.12 ; U1.128 27.63,30.92 ; U1.128 v1(26.95,30.4) ; U1.128 26.27,30.92 ; 49.98,4.9 49.98,5.7 ; 49.98,5.7 49.17,5.7 ; 49.98,5.7 49.98,6.5 ; v1(59.51,17.7) 60,17.7 ; v1(59.51,17.7) 59.51,18.18 ; v1(59.51,17.7) 59.03,17.7 ; v1(59.51,17.7) 59.51,17.22 ; 59.51,13.22 v1(59.51,13.7) ; v1(59.51,13.7) 59.03,13.7 ; v1(59.51,13.7) 60,13.7 ; v1(59.51,13.7) 59.51,14.18 ; v1(33.5,73.56) 33.99,73.56 ; v1(33.5,73.56) 33.5,74.04 ; v1(33.5,73.56) 33.5,73.08 ; v1(33.5,73.56) 33.02,73.56 ; v1(0.52,11.6) 0.52,12.09 ; v1(0.52,11.6) 1,11.6 ; v1(0.52,11.6) 0.52,11.12 ; C7.2 32.27,26.48 ; 32.27,26.48 v1(32.6,26.15) ; 32.27,26.48 C25.2 ; 25.02,73.56 v1(25.5,73.56) ; v1(25.5,73.56) 25.99,73.56 ; v1(25.5,73.56) 25.5,74.04 ; v1(25.5,73.56) 25.5,73.08 ; 37.17,20.6 C5.2 ; C5.2 37.17,21.5 ; U6.1 33.7,66.28 ; U6.1 33.17,65.1 ; U6.1 34.23,65.1 ; U6.1 33.7,63.92 ; 59.03,11.7 v1(59.51,11.7) ; v1(59.51,11.7) 59.51,11.22 ; v1(59.51,11.7) 60,11.7 ; v1(59.51,11.7) 59.51,12.18 ; v1(4.52,11.6) 5,11.6 ; v1(4.52,11.6) 4.52,11.12 ; v1(4.52,11.6) 4.03,11.6 ; v1(4.52,11.6) 4.52,12.09 ; 65.51,17.22 v1(65.51,17.7) ; v1(65.51,17.7) 65.51,18.18 ; v1(65.51,17.7) 66,17.7 ; v1(65.51,17.7) 65.03,17.7 ; v1(27.5,75.56) 27.5,76.04 ; v1(27.5,75.56) 27.5,75.08 ; v1(27.5,75.56) 27.99,75.56 ; v1(27.5,75.56) 27.02,75.56 ; 50.85,25.52 J11.7 ; J11.7 49.32,26.45 ; J11.7 52.38,26.45 ; 25.3,60.03 v1(25.3,60.52) ; v1(25.3,60.52) 25.79,60.52 ; v1(25.3,60.52) 25.3,61 ; v1(25.3,60.52) 24.82,60.52 ; 18.1,63.57 C60.2 ; C60.2 18.73,64.35 ; C60.2 17.47,64.35 ; C60.2 18.1,65.13 ; 20.52,11.12 v1(20.52,11.6) ; v1(20.52,11.6) 20.52,12.09 ; v1(20.52,11.6) 20.03,11.6 ; v1(20.52,11.6) 21,11.6 ; 27.08,45.4 C1.2 ; C1.2 26.65,45.85 ; C1.2 27.08,46.3 ; 69.1,73.07 SW1.1 ; SW1.1 69.1,74.33 ; SW1.1 69.88,73.7 ; C36.2 13.4,47.4 ; C36.2 14.03,46.8 ; C36.2 12.77,46.8 ; 9.42,61.6 J10.3 ; J10.3 12.78,61.6 ; J10.3 11.1,60.77 ; J10.3 11.1,62.43 ; U2.13 v1(9.35,21.05) ; 61.03,11.7 v1(61.51,11.7) ; v1(61.51,11.7) 61.51,11.22 ; v1(61.51,11.7) 62,11.7 ; v1(61.51,11.7) 61.51,12.18 ; 58.47,61.2 C57.2 ; C57.2 59.73,61.2 ; C57.2 59.1,60.6 ; Q1.1 64.01,64.53 ; Q1.1 64.44,64.14 ; Q1.1 64.01,63.75 ; Q1.1 63.58,64.14 ; 61.72,31.2 C32.2 62.35,31.8 ; 6.88,19.5 C29.2 5.62,19.5 ; v1(61.51,15.7) 61.51,16.18 ; v1(61.51,15.7) 61.51,15.22 ; v1(61.51,15.7) 61.03,15.7 ; v1(61.51,15.7) 62,15.7 ; R43.2 49.65,17.76 ; R43.2 49.05,18.48 ; R43.2 48.44,17.76 ; U4.9 9.42,55.9 ; U4.9 10.27,55.9
  BOTTOM w0.127: v1(59.5,73.56) 59.99,73.56 ; v1(59.5,73.56) 59.5,73.08 ; v1(59.5,73.56) 59.02,73.56 ; v1(59.5,73.56) 59.5,74.04 ; v1(4.52,9.6) 5,9.6 ; v1(4.52,9.6) 4.03,9.6 ; v1(4.52,9.6) 4.52,9.12 ; v1(4.52,9.6) 4.52,10.09 ; 33.5,73.08 v1(33.5,73.56) ; v1(33.5,73.56) 33.99,73.56 ; v1(33.5,73.56) 33.5,74.04 ; v1(33.5,73.56) 33.02,73.56 ; 61.03,19.7 v1(61.51,19.7) ; v1(61.51,19.7) 61.51,20.18 ; v1(61.51,19.7) 61.51,19.22 ; v1(61.51,19.7) 62,19.7 ; 44.79,10.63 v1(45.27,10.63) ; v1(45.27,10.63) 45.76,10.63 ; v1(45.27,10.63) 45.27,11.12 ; v1(45.27,10.63) 45.27,10.15 ; 63.03,15.7 v1(63.51,15.7) ; v1(63.51,15.7) 63.51,15.22 ; v1(63.51,15.7) 63.51,16.18 ; v1(63.51,15.7) 64,15.7 ; 10.52,9.12 v1(10.52,9.6) ; v1(10.52,9.6) 11,9.6 ; v1(10.52,9.6) 10.52,10.09 ; v1(10.52,9.6) 10.03,9.6 ; 65.03,21.7 v1(65.51,21.7) ; v1(65.51,21.7) 66,21.7 ; v1(65.51,21.7) 65.51,22.18 ; v1(65.51,21.7) 65.51,21.22 ; 57.51,7.22 v1(57.51,7.7) ; v1(57.51,7.7) 57.03,7.7 ; v1(57.51,7.7) 58,7.7 ; v1(57.51,7.7) 57.51,8.18 ; 0.52,11.12 v1(0.52,11.6) ; v1(0.52,11.6) 1,11.6 ; v1(0.52,11.6) 0.52,12.09 ; v1(55.5,75.56) 55.99,75.56 ; v1(55.5,75.56) 55.02,75.56 ; v1(55.5,75.56) 55.5,75.08 ; v1(55.5,75.56) 55.5,76.04 ; J2.11 14,29.86 ; J2.11 14.88,29.08 ; J2.11 14,28.3 ; J2.11 13.12,29.08 ; v1(9.35,21.05) v1(9.35,18.2) ; 40.92,54.33 v1(40.92,54.81) ; v1(40.92,54.81) 41.41,54.81 ; v1(40.92,54.81) 40.44,54.81 ; v1(40.92,54.81) 40.92,55.29 ; 35.02,75.56 v1(35.5,75.56) ; v1(35.5,75.56) 35.5,75.08 ; v1(35.5,75.56) 35.99,75.56 ; v1(35.5,75.56) 35.5,76.04 ; J11.6 59.38,31.95 ; J11.6 57.85,31.02 ; J11.6 56.32,31.95 ; J11.6 57.85,32.88 ; 57.51,13.22 v1(57.51,13.7) ; v1(57.51,13.7) 57.03,13.7 ; v1(57.51,13.7) 57.51,14.18 ; v1(57.51,13.7) 58,13.7 ; v1(59.51,17.7) 60,17.7 ; v1(59.51,17.7) 59.03,17.7 ; v1(59.51,17.7) 59.51,18.18 ; v1(59.51,17.7) 59.51,17.22 ; v1(17.5,73.56) 17.5,74.04 ; v1(17.5,73.56) 17.5,73.08 ; v1(17.5,73.56) 17.02,73.56 ; v1(17.5,73.56) 17.99,73.56 ; 66.68,55.65 J3.36 64.82,55.65 ; v1(41.27,6.63) 41.76,6.63 ; v1(41.27,6.63) 41.27,6.15 ; v1(41.27,6.63) 41.27,7.12 ; v1(41.27,6.63) 40.79,6.63 ; 35.03,42.08 v1(35.52,42.08) ; v1(35.52,42.08) 36,42.08 ; v1(35.52,42.08) 35.52,42.56 ; v1(35.52,42.08) 35.52,41.6 ; v1(43.27,2.63) 43.76,2.63 ; v1(43.27,2.63) 42.79,2.63 ; v1(43.27,2.63) 43.27,2.15 ; v1(43.27,2.63) 43.27,3.12 ; v1(65.51,17.7) 65.51,18.18 ; v1(65.51,17.7) 65.51,17.22 ; v1(65.51,17.7) 65.03,17.7 ; v1(65.51,17.7) 66,17.7 ; v1(41.5,73.56) 41.99,73.56 ; v1(41.5,73.56) 41.5,73.08 ; v1(41.5,73.56) 41.5,74.04 ; v1(41.5,73.56) 41.02,73.56 ; v1(63.51,9.7) 64,9.7 ; v1(63.51,9.7) 63.03,9.7 ; v1(63.51,9.7) 63.51,10.18 ; v1(63.51,9.7) 63.51,9.22 ; v1(39.5,75.56) 39.99,75.56 ; v1(39.5,75.56) 39.02,75.56 ; v1(39.5,75.56) 39.5,75.08 ; v1(39.5,75.56) 39.5,76.04 ; v1(63.51,21.7) 63.51,22.18 ; v1(63.51,21.7) 64,21.7 ; v1(63.51,21.7) 63.51,21.22 ; v1(63.51,21.7) 63.03,21.7 ; 36.17,30.84 v1(36.65,30.84) ; v1(36.65,30.84) 36.65,31.32 ; v1(36.65,30.84) 36.65,30.35 ; v1(36.65,30.84) 37.13,30.84 ; v1(25.3,56.52) 25.79,56.52 ; v1(25.3,56.52) 25.3,56.03 ; v1(25.3,56.52) 25.3,57 ; v1(25.3,56.52) 24.82,56.52 ; v1(41.27,12.63) 41.76,12.63 ; v1(41.27,12.63) 40.79,12.63 ; v1(41.27,12.63) 41.27,12.15 ; v1(41.27,12.63) 41.27,13.12 ; 38.79,8.63 v1(39.27,8.63) ; v1(39.27,8.63) 39.27,9.12 ; v1(39.27,8.63) 39.76,8.63 ; v1(39.27,8.63) 39.27,8.15 ; v1(12.52,9.6) 12.52,10.09 ; v1(12.52,9.6) 12.52,9.12 ; v1(12.52,9.6) 12.03,9.6 ; v1(12.52,9.6) 13,9.6 ; v1(61.51,15.7) 62,15.7 ; v1(61.51,15.7) 61.51,16.18 ; v1(61.51,15.7) 61.03,15.7 ; v1(61.51,15.7) 61.51,15.22 ; v1(31.5,75.56) 31.99,75.56 ; v1(31.5,75.56) 31.02,75.56 ; v1(31.5,75.56) 31.5,76.04 ; v1(31.5,75.56) 31.5,75.08 ; v1(39.27,12.63) 39.27,13.12 ; v1(39.27,12.63) 39.27,12.15 ; v1(39.27,12.63) 38.79,12.63 ; v1(39.27,12.63) 39.76,12.63 ; v1(63.51,17.7) 63.51,18.18 ; v1(63.51,17.7) 63.51,17.22 ; v1(63.51,17.7) 63.03,17.7 ; v1(63.51,17.7) 64,17.7 ; 57.51,19.22 v1(57.51,19.7) ; v1(57.51,19.7) 58,19.7 ; v1(57.51,19.7) 57.51,20.18 ; v1(57.51,19.7) 57.03,19.7 ; J11.7 52.38,26.45 ; J11.7 50.85,25.52 ; J11.7 49.32,26.45 ; J11.7 50.85,27.38 ; v1(43.27,12.63) 43.76,12.63 ; v1(43.27,12.63) 43.27,13.12 ; v1(43.27,12.63) 43.27,12.15 ; v1(43.27,12.63) 42.79,12.63 ; v1(17.5,75.56) 17.99,75.56 ; v1(17.5,75.56) 17.02,75.56 ; v1(17.5,75.56) 17.5,76.04 ; v1(17.5,75.56) 17.5,75.08 ; v1(39.52,40.08) 40,40.08 ; v1(39.52,40.08) 39.03,40.08 ; v1(39.52,40.08) 39.52,39.6 ; v1(39.52,40.08) 39.52,40.56 ; 44.79,4.63 v1(45.27,4.63) ; v1(45.27,4.63) 45.76,4.63 ; v1(45.27,4.63) 45.27,5.12 ; v1(45.27,4.63) 45.27,4.15 ; v1(65.51,23.7) 66,23.7 ; v1(65.51,23.7) 65.51,24.18 ; v1(65.51,23.7) 65.51,23.22 ; v1(65.51,23.7) 65.03,23.7 ; 44.92,54.33 v1(44.92,54.81) ; v1(44.92,54.81) 44.44,54.81 ; v1(44.92,54.81) 44.92,55.29 ; v1(44.92,54.81) 45.41,54.81 ; v1(33.5,75.56) 33.5,76.04 ; v1(33.5,75.56) 33.5,75.08 ; v1(33.5,75.56) 33.02,75.56 ; v1(33.5,75.56) 33.99,75.56 ; 20.52,11.12 v1(20.52,11.6) ; v1(20.52,11.6) 20.52,12.09 ; v1(20.52,11.6) 21,11.6 ; v1(20.52,11.6) 20.03,11.6 ; v1(57.5,75.56) 57.99,75.56 ; v1(57.5,75.56) 57.5,76.04 ; v1(57.5,75.56) 57.5,75.08 ; v1(57.5,75.56) 57.02,75.56 ; 2.52,7.12 v1(2.52,7.6) ; v1(2.52,7.6) 2.52,8.09 ; v1(2.52,7.6) 2.03,7.6 ; v1(2.52,7.6) 3,7.6 ; 47.5,73.08 v1(47.5,73.56) ; v1(47.5,73.56) 47.02,73.56 ; v1(47.5,73.56) 47.5,74.04 ; v1(47.5,73.56) 47.99,73.56 ; 4.52,11.12 v1(4.52,11.6) ; v1(4.52,11.6) 4.03,11.6 ; v1(4.52,11.6) 4.52,12.09 ; v1(4.52,11.6) 5,11.6 ; 23.3,58.03 v1(23.3,58.52) ; v1(23.3,58.52) 23.3,59 ; v1(23.3,58.52) 22.82,58.52 ; v1(23.3,58.52) 23.79,58.52 ; 40.79,8.63 v1(41.27,8.63) ; v1(41.27,8.63) 41.76,8.63 ; v1(41.27,8.63) 41.27,9.12 ; v1(41.27,8.63) 41.27,8.15 ; v1(8.52,9.6) 9,9.6 ; v1(8.52,9.6) 8.52,9.12 ; v1(8.52,9.6) 8.52,10.09 ; v1(8.52,9.6) 8.03,9.6 ; v1(23.5,75.56) 23.5,76.04 ; v1(23.5,75.56) 23.5,75.08 ; v1(23.5,75.56) 23.02,75.56 ; v1(23.5,75.56) 23.99,75.56 ; 56,1.52 J12.8 ; J12.8 56,4.28 ; J12.8 55.27,2.9 ; J12.8 56.73,2.9 ; 11.02,73.56 v1(11.5,73.56) ; v1(11.5,73.56) 11.99,73.56 ; v1(11.5,73.56) 11.5,73.08 ; v1(11.5,73.56) 11.5,74.04 ; 6.03,9.6 v1(6.52,9.6) ; v1(6.52,9.6) 6.52,9.12 ; v1(6.52,9.6) 7,9.6 ; v1(6.52,9.6) 6.52,10.09 ; v1(41.27,2.63) 41.27,3.12 ; v1(41.27,2.63) 40.79,2.63 ; v1(41.27,2.63) 41.27,2.15 ; v1(41.27,2.63) 41.76,2.63 ; J11.5 57.85,27.38 ; J11.5 56.32,26.45 ; J11.5 57.85,25.52 ; J11.5 59.38,26.45 ; v1(0.52,7.6) 0.52,8.09 ; v1(0.52,7.6) 0.52,7.12 ; v1(0.52,7.6) 1,7.6 ; 4.03,7.6 v1(4.52,7.6) ; v1(4.52,7.6) 4.52,7.12 ; v1(4.52,7.6) 5,7.6 ; v1(4.52,7.6) 4.52,8.09 ; v1(31.04,54.78) 31.04,55.27 ; v1(31.04,54.78) 31.52,54.78 ; v1(31.04,54.78) 31.04,54.3 ; 63.03,13.7 v1(63.51,13.7) ; v1(63.51,13.7) 64,13.7 ; v1(63.51,13.7) 63.51,13.22 ; v1(63.51,13.7) 63.51,14.18 ; J11.8 52.38,31.95 ; J11.8 50.85,31.02 ; J11.8 50.85,32.88 ; J11.8 49.32,31.95 ; v1(47.27,8.63) 47.76,8.63 ; v1(47.27,8.63) 47.27,9.12 ; v1(47.27,8.63) 46.79,8.63 ; v1(47.27,8.63) 47.27,8.15 ; v1(41.27,4.63) 41.76,4.63 ; v1(41.27,4.63) 40.79,4.63 ; v1(41.27,4.63) 41.27,5.12 ; v1(41.27,4.63) 41.27,4.15 ; 38.44,54.81 v1(38.92,54.81) ; v1(38.92,54.81) 38.92,55.29 ; v1(38.92,54.81) 38.92,54.33 ; v1(38.92,54.81) 39.41,54.81 ; v1(27.3,56.52) 27.79,56.52 ; v1(27.3,56.52) 27.3,57 ; v1(27.3,56.52) 26.82,56.52 ; v1(27.3,56.52) 27.3,56.03 ; 38.79,4.63 v1(39.27,4.63) ; v1(39.27,4.63) 39.76,4.63 ; v1(39.27,4.63) 39.27,5.12 ; v1(39.27,4.63) 39.27,4.15 ; v1(19.5,73.56) 19.5,74.04 ; v1(19.5,73.56) 19.99,73.56 ; v1(19.5,73.56) 19.02,73.56 ; v1(19.5,73.56) 19.5,73.08 ; 11.55,57.39 v1(12.03,57.39) ; v1(12.03,57.39) 12.03,57.88 ; v1(12.03,57.39) 12.52,57.39 ; v1(12.03,57.39) 12.03,56.91 ; v1(65.51,15.7) 65.51,16.18 ; v1(65.51,15.7) 65.03,15.7 ; v1(65.51,15.7) 66,15.7 ; v1(65.51,15.7) 65.51,15.22 ; 18.03,7.6 v1(18.52,7.6) ; v1(18.52,7.6) 18.52,7.12 ; v1(18.52,7.6) 19,7.6 ; v1(18.52,7.6) 18.52,8.09 ; v1(37.52,42.08) 38,42.08 ; v1(37.52,42.08) 37.03,42.08 ; v1(37.52,42.08) 37.52,42.56 ; v1(37.52,42.08) 37.52,41.6 ; v1(65.51,11.7) 66,11.7 ; v1(65.51,11.7) 65.03,11.7 ; v1(65.51,11.7) 65.51,11.22 ; v1(65.51,11.7) 65.51,12.18 ; v1(39.52,42.08) 40,42.08 ; v1(39.52,42.08) 39.52,41.6 ; v1(39.52,42.08) 39.03,42.08 ; v1(39.52,42.08) 39.52,42.56 ; 38.79,10.63 v1(39.27,10.63) ; v1(39.27,10.63) 39.76,10.63 ; v1(39.27,10.63) 39.27,10.15 ; v1(39.27,10.63) 39.27,11.12 ; v1(55.5,73.56) 55.99,73.56 ; v1(55.5,73.56) 55.5,74.04 ; v1(55.5,73.56) 55.5,73.08 ; v1(55.5,73.56) 55.02,73.56 ; v1(43.27,4.63) 43.76,4.63 ; v1(43.27,4.63) 43.27,4.15 ; v1(43.27,4.63) 43.27,5.12 ; v1(43.27,4.63) 42.79,4.63 ; 49.98,4.9 49.98,5.7 ; 49.98,5.7 50.78,5.7 ; 49.98,5.7 49.17,5.7 ; 49.98,5.7 49.98,6.5 ; v1(8.52,7.6) 8.52,8.09 ; v1(8.52,7.6) 8.52,7.12 ; v1(8.52,7.6) 9,7.6 ; v1(8.52,7.6) 8.03,7.6 ; 32.56,50.78 v1(33.04,50.78) ; v1(33.04,50.78) 33.04,50.3 ; v1(33.04,50.78) 33.04,51.27 ; v1(33.04,50.78) 33.52,50.78 ; 14.03,7.6 v1(14.52,7.6) ; v1(14.52,7.6) 14.52,8.09 ; v1(14.52,7.6) 14.52,7.12 ; v1(14.52,7.6) 15,7.6 ; v1(45.27,8.63) 45.76,8.63 ; v1(45.27,8.63) 44.79,8.63 ; v1(45.27,8.63) 45.27,9.12 ; v1(45.27,8.63) 45.27,8.15 ; 33.04,54.3 v1(33.04,54.78) ; v1(33.04,54.78) 32.56,54.78 ; v1(33.04,54.78) 33.04,55.27 ; v1(33.04,54.78) 33.52,54.78 ; v1(61.51,13.7) 61.51,14.18 ; v1(61.51,13.7) 61.51,13.22 ; v1(61.51,13.7) 61.03,13.7 ; v1(61.51,13.7) 62,13.7 ; J12.9 49.53,2.9 ; J12.9 48.8,1.52 ; J12.9 48.07,2.9 ; J12.9 48.8,4.28 ; 42.44,54.81 v1(42.92,54.81) ; v1(42.92,54.81) 42.92,55.29 ; v1(42.92,54.81) 42.92,54.33 ; v1(42.92,54.81) 43.41,54.81 ; v1(34.65,30.84) 34.65,31.32 ; v1(34.65,30.84) 34.17,30.84 ; v1(34.65,30.84) 34.65,30.35 ; v1(34.65,30.84) 35.13,30.84 ; 61.03,9.7 v1(61.51,9.7) ; v1(61.51,9.7) 62,9.7 ; v1(61.51,9.7) 61.51,9.22 ; v1(61.51,9.7) 61.51,10.18 ; v1(57.51,17.7) 58,17.7 ; v1(57.51,17.7) 57.51,18.18 ; v1(57.51,17.7) 57.51,17.22 ; v1(57.51,17.7) 57.03,17.7 ; v1(13.5,75.56) 13.5,76.04 ; v1(13.5,75.56) 13.02,75.56 ; v1(13.5,75.56) 13.5,75.08 ; v1(13.5,75.56) 13.99,75.56 ; v1(15.5,75.56) 15.99,75.56 ; v1(15.5,75.56) 15.5,76.04 ; v1(15.5,75.56) 15.02,75.56 ; v1(15.5,75.56) 15.5,75.08 ; v1(27.3,58.52) 27.3,59 ; v1(27.3,58.52) 26.82,58.52 ; v1(27.3,58.52) 27.3,58.03 ; v1(27.3,58.52) 27.79,58.52 ; 47.02,75.56 v1(47.5,75.56) ; v1(47.5,75.56) 47.99,75.56 ; v1(47.5,75.56) 47.5,75.08 ; v1(47.5,75.56) 47.5,76.04 ; v1(6.52,11.6) 6.52,12.09 ; v1(6.52,11.6) 6.52,11.12 ; v1(6.52,11.6) 6.03,11.6 ; v1(6.52,11.6) 7,11.6 ; J3.3 66.85,39.15 ; v1(12.03,59.39) 12.52,59.39 ; v1(12.03,59.39) 12.03,58.91 ; v1(12.03,59.39) 11.55,59.39 ; v1(12.03,59.39) 12.03,59.88 ; 67.51,17.22 v1(67.51,17.7) ; v1(67.51,17.7) 68,17.7 ; v1(67.51,17.7) 67.03,17.7 ; v1(67.51,17.7) 67.51,18.18 ; v1(41.27,0.63) 41.76,0.63 ; v1(41.27,0.63) 40.79,0.63 ; v1(41.27,0.63) 41.27,0.15 ; v1(41.27,0.63) 41.27,1.12 ; J2.6 15.5,19.43 ; J2.6 14.67,18.9 ; J2.6 15.5,18.37 ; J2.6 16.33,18.9 ; v1(16.52,11.6) 16.52,12.09 ; v1(16.52,11.6) 16.52,11.12 ; v1(16.52,11.6) 16.03,11.6 ; v1(16.52,11.6) 17,11.6 ; 64.82,48.65 J3.22 66.68,48.65 ; v1(45.27,6.63) 45.76,6.63 ; v1(45.27,6.63) 44.79,6.63 ; v1(45.27,6.63) 45.27,6.15 ; v1(45.27,6.63) 45.27,7.12 ; v1(31.04,56.78) 31.52,56.78 ; v1(31.04,56.78) 31.04,56.3 ; v1(31.04,56.78) 31.04,57.27 ; 39.27,6.15 v1(39.27,6.63) ; v1(39.27,6.63) 39.76,6.63 ; v1(39.27,6.63) 38.79,6.63 ; v1(39.27,6.63) 39.27,7.12 ; v1(45.27,12.63) 45.76,12.63 ; v1(45.27,12.63) 45.27,13.12 ; v1(45.27,12.63) 44.79,12.63 ; v1(45.27,12.63) 45.27,12.15 ; 0.52,9.12 v1(0.52,9.6) ; v1(0.52,9.6) 1,9.6 ; v1(0.52,9.6) 0.52,10.09 ; 20.03,7.6 v1(20.52,7.6) ; v1(20.52,7.6) 20.52,8.09 ; v1(20.52,7.6) 20.52,7.12 ; v1(20.52,7.6) 21,7.6 ; v1(35.52,40.08) 36,40.08 ; v1(35.52,40.08) 35.52,40.56 ; v1(35.52,40.08) 35.03,40.08 ; v1(35.52,40.08) 35.52,39.6 ; 59.51,23.22 v1(59.51,23.7) ; v1(59.51,23.7) 59.51,24.18 ; v1(59.51,23.7) 59.03,23.7 ; v1(59.51,23.7) 60,23.7 ; 15.55,57.39 v1(16.03,57.39) ; v1(16.03,57.39) 16.03,56.91 ; v1(16.03,57.39) 16.52,57.39 ; v1(16.03,57.39) 16.03,57.88 ; 34.17,32.84 v1(34.65,32.84) ; v1(34.65,32.84) 34.65,32.35 ; v1(34.65,32.84) 35.13,32.84 ; v1(34.65,32.84) 34.65,33.32 ; v1(37.52,40.08) 38,40.08 ; v1(37.52,40.08) 37.52,40.56 ; v1(37.52,40.08) 37.03,40.08 ; v1(37.52,40.08) 37.52,39.6 ; 45.27,2.15 v1(45.27,2.63) ; v1(45.27,2.63) 45.76,2.63 ; v1(45.27,2.63) 44.79,2.63 ; v1(45.27,2.63) 45.27,3.12 ; 7.6,64.32 J10.2 ; J10.2 7.6,68.18 ; J10.2 8.43,66.25 ; J10.2 6.77,66.25 ; 16.03,58.91 v1(16.03,59.39) ; v1(16.03,59.39) 16.03,59.88 ; v1(16.03,59.39) 15.55,59.39 ; v1(16.03,59.39) 16.52,59.39 ; 59.03,15.7 v1(59.51,15.7) ; v1(59.51,15.7) 59.51,16.18 ; v1(59.51,15.7) 59.51,15.22 ; v1(59.51,15.7) 60,15.7 ; 42.22,44.04 v1(42.7,44.04) ; v1(42.7,44.04) 43.19,44.04 ; v1(42.7,44.04) 42.7,43.56 ; v1(42.7,44.04) 42.7,44.52 ; J2.13 4.3,31.2 ; J2.13 3.42,30.42 ; J2.13 4.3,29.64 ; J2.13 5.18,30.42 ; 39.27,2.15 v1(39.27,2.63) ; v1(39.27,2.63) 39.76,2.63 ; v1(39.27,2.63) 38.79,2.63 ; v1(39.27,2.63) 39.27,3.12 ; v1(21.5,75.56) 21.5,76.04 ; v1(21.5,75.56) 21.99,75.56 ; v1(21.5,75.56) 21.02,75.56 ; v1(21.5,75.56) 21.5,75.08 ; v1(12.52,7.6) 12.52,8.09 ; v1(12.52,7.6) 12.52,7.12 ; v1(12.52,7.6) 12.03,7.6 ; v1(12.52,7.6) 13,7.6 ; v1(59.51,19.7) 60,19.7 ; v1(59.51,19.7) 59.51,20.18 ; v1(59.51,19.7) 59.51,19.22 ; v1(59.51,19.7) 59.03,19.7 ; v1(43.27,6.63) 43.27,7.12 ; v1(43.27,6.63) 42.79,6.63 ; v1(43.27,6.63) 43.27,6.15 ; v1(43.27,6.63) 43.76,6.63 ; 44.79,0.63 v1(45.27,0.63) ; v1(45.27,0.63) 45.27,1.12 ; v1(45.27,0.63) 45.27,0.15 ; v1(45.27,0.63) 45.76,0.63 ; 64.82,40.65 J3.6 66.68,40.65 ; 38.79,0.63 v1(39.27,0.63) ; v1(39.27,0.63) 39.27,0.15 ; v1(39.27,0.63) 39.76,0.63 ; v1(39.27,0.63) 39.27,1.12 ; 13.02,73.56 v1(13.5,73.56) ; v1(13.5,73.56) 13.99,73.56 ; v1(13.5,73.56) 13.5,74.04 ; v1(13.5,73.56) 13.5,73.08 ; v1(6.52,7.6) 7,7.6 ; v1(6.52,7.6) 6.52,7.12 ; v1(6.52,7.6) 6.52,8.09 ; v1(6.52,7.6) 6.03,7.6 ; v1(27.5,75.56) 27.99,75.56 ; v1(27.5,75.56) 27.5,75.08 ; v1(27.5,75.56) 27.5,76.04 ; v1(27.5,75.56) 27.02,75.56 ; v1(67.51,15.7) 68,15.7 ; v1(67.51,15.7) 67.51,15.22 ; v1(67.51,15.7) 67.03,15.7 ; v1(67.51,15.7) 67.51,16.18 ; 61.51,23.22 v1(61.51,23.7) ; v1(61.51,23.7) 61.51,24.18 ; v1(61.51,23.7) 62,23.7 ; v1(61.51,23.7) 61.03,23.7 ; v1(14.52,11.6) 14.52,12.09 ; v1(14.52,11.6) 14.03,11.6 ; v1(14.52,11.6) 15,11.6 ; v1(14.52,11.6) 14.52,11.12 ; 25.5,73.08 v1(25.5,73.56) ; v1(25.5,73.56) 25.02,73.56 ; v1(25.5,73.56) 25.5,74.04 ; v1(25.5,73.56) 25.99,73.56 ; v1(29.5,75.56) 29.5,76.04 ; v1(29.5,75.56) 29.5,75.08 ; v1(29.5,75.56) 29.02,75.56 ; v1(29.5,75.56) 29.99,75.56 ; J10.3 11.1,62.43 ; J10.3 11.1,60.77 ; J10.3 12.78,61.6 ; J10.3 9.42,61.6 ; 17.55,39.74 J7.3 ; J7.3 16.57,40.72 ; J7.3 18.53,40.72 ; J7.3 17.55,41.7 ; v1(51.5,73.56) 51.99,73.56 ; v1(51.5,73.56) 51.02,73.56 ; v1(51.5,73.56) 51.5,73.08 ; v1(51.5,73.56) 51.5,74.04 ; 66.68,44.65 J3.14 64.82,44.65 ; 29.5,73.08 v1(29.5,73.56) ; v1(29.5,73.56) 29.99,73.56 ; v1(29.5,73.56) 29.5,74.04 ; v1(29.5,73.56) 29.02,73.56 ; J2.12 5.18,14.2 ; J2.12 3.42,14.2 ; J2.12 4.3,14.98 ; J2.12 4.3,13.42 ; 59.03,9.7 v1(59.51,9.7) ; v1(59.51,9.7) 60,9.7 ; v1(59.51,9.7) 59.51,10.18 ; v1(59.51,9.7) 59.51,9.22 ; v1(63.51,11.7) 63.51,12.18 ; v1(63.51,11.7) 64,11.7 ; v1(63.51,11.7) 63.03,11.7 ; v1(63.51,11.7) 63.51,11.22 ; v1(61.51,11.7) 61.51,12.18 ; v1(61.51,11.7) 61.03,11.7 ; v1(61.51,11.7) 61.51,11.22 ; v1(61.51,11.7) 62,11.7 ; v1(23.3,62.52) 23.3,63 ; v1(23.3,62.52) 22.82,62.52 ; v1(23.3,62.52) 23.79,62.52 ; v1(23.3,62.52) 23.3,62.03 ; v1(27.3,62.52) 27.3,63 ; v1(27.3,62.52) 27.3,62.03 ; v1(27.3,62.52) 26.82,62.52 ; v1(27.3,62.52) 27.79,62.52 ; 24.82,60.52 v1(25.3,60.52) ; v1(25.3,60.52) 25.3,60.03 ; v1(25.3,60.52) 25.79,60.52 ; v1(25.3,60.52) 25.3,61 ; v1(59.5,75.56) 59.99,75.56 ; v1(59.5,75.56) 59.5,76.04 ; v1(59.5,75.56) 59.5,75.08 ; v1(59.5,75.56) 59.02,75.56 ; 9.5,75.08 v1(9.5,75.56) ; v1(9.5,75.56) 9.99,75.56 ; v1(9.5,75.56) 9.02,75.56 ; v1(9.5,75.56) 9.5,76.04 ; 67.03,9.7 v1(67.51,9.7) ; v1(67.51,9.7) 67.51,10.18 ; v1(67.51,9.7) 67.51,9.22 ; v1(67.51,9.7) 68,9.7 ; 40.79,10.63 v1(41.27,10.63) ; v1(41.27,10.63) 41.27,10.15 ; v1(41.27,10.63) 41.27,11.12 ; v1(41.27,10.63) 41.76,10.63 ; 53.02,73.56 v1(53.5,73.56) ; v1(53.5,73.56) 53.99,73.56 ; v1(53.5,73.56) 53.5,73.08 ; v1(53.5,73.56) 53.5,74.04 ; 21.5,73.08 v1(21.5,73.56) ; v1(21.5,73.56) 21.5,74.04 ; v1(21.5,73.56) 21.02,73.56 ; v1(21.5,73.56) 21.99,73.56 ; v1(10.52,11.6) 11,11.6 ; v1(10.52,11.6) 10.52,11.12 ; v1(10.52,11.6) 10.52,12.09 ; v1(10.52,11.6) 10.03,11.6 ; v1(33.04,52.78) 33.04,53.27 ; v1(33.04,52.78) 33.04,52.3 ; v1(33.04,52.78) 33.52,52.78 ; v1(33.04,52.78) 32.56,52.78 ; v1(25.3,62.52) 25.79,62.52 ; v1(25.3,62.52) 24.82,62.52 ; v1(25.3,62.52) 25.3,63 ; v1(25.3,62.52) 25.3,62.03 ; 57.5,73.08 v1(57.5,73.56) ; v1(57.5,73.56) 57.02,73.56 ; v1(57.5,73.56) 57.99,73.56 ; v1(57.5,73.56) 57.5,74.04 ; v1(37.5,73.56) 37.5,74.04 ; v1(37.5,73.56) 37.99,73.56 ; v1(37.5,73.56) 37.02,73.56 ; v1(37.5,73.56) 37.5,73.08 ; 12.52,11.12 v1(12.52,11.6) ; v1(12.52,11.6) 12.03,11.6 ; v1(12.52,11.6) 13,11.6 ; v1(12.52,11.6) 12.52,12.09 ; 27.5,73.08 v1(27.5,73.56) ; v1(27.5,73.56) 27.5,74.04 ; v1(27.5,73.56) 27.02,73.56 ; v1(27.5,73.56) 27.99,73.56 ; 49.02,75.56 v1(49.5,75.56) ; v1(49.5,75.56) 49.5,75.08 ; v1(49.5,75.56) 49.99,75.56 ; v1(49.5,75.56) 49.5,76.04 ; v1(2.52,9.6) 3,9.6 ; v1(2.52,9.6) 2.52,10.09 ; v1(2.52,9.6) 2.03,9.6 ; v1(2.52,9.6) 2.52,9.12 ; v1(18.52,9.6) 19,9.6 ; v1(18.52,9.6) 18.52,10.09 ; v1(18.52,9.6) 18.52,9.12 ; v1(18.52,9.6) 18.03,9.6 ; 37.5,75.08 v1(37.5,75.56) ; v1(37.5,75.56) 37.5,76.04 ; v1(37.5,75.56) 37.99,75.56 ; v1(37.5,75.56) 37.02,75.56 ; v1(34.65,34.84) 35.13,34.84 ; v1(34.65,34.84) 34.65,34.35 ; v1(34.65,34.84) 34.17,34.84 ; v1(34.65,34.84) 34.65,35.32 ; v1(8.52,11.6) 8.52,12.09 ; v1(8.52,11.6) 8.52,11.12 ; v1(8.52,11.6) 9,11.6 ; v1(8.52,11.6) 8.03,11.6 ; 35.02,73.56 v1(35.5,73.56) ; v1(35.5,73.56) 35.5,74.04 ; v1(35.5,73.56) 35.99,73.56 ; v1(35.5,73.56) 35.5,73.08 ; v1(67.51,19.7) 67.51,20.18 ; v1(67.51,19.7) 67.03,19.7 ; v1(67.51,19.7) 68,19.7 ; v1(67.51,19.7) 67.51,19.22 ; v1(43.27,8.63) 43.27,9.12 ; v1(43.27,8.63) 43.76,8.63 ; v1(43.27,8.63) 43.27,8.15 ; v1(43.27,8.63) 42.79,8.63 ; v1(47.27,10.63) 47.27,11.12 ; v1(47.27,10.63) 46.79,10.63 ; v1(47.27,10.63) 47.27,10.15 ; v1(47.27,10.63) 47.76,10.63 ; 65.51,13.22 v1(65.51,13.7) ; v1(65.51,13.7) 65.51,14.18 ; v1(65.51,13.7) 65.03,13.7 ; v1(65.51,13.7) 66,13.7 ; 59.51,21.22 v1(59.51,21.7) ; v1(59.51,21.7) 60,21.7 ; v1(59.51,21.7) 59.51,22.18 ; v1(59.51,21.7) 59.03,21.7 ; v1(67.51,23.7) 68,23.7 ; v1(67.51,23.7) 67.03,23.7 ; v1(67.51,23.7) 67.51,23.22 ; v1(67.51,23.7) 67.51,24.18 ; 41.27,14.15 v1(41.27,14.63) ; v1(41.27,14.63) 41.27,15.12 ; v1(41.27,14.63) 41.76,14.63 ; v1(41.27,14.63) 40.79,14.63 ; v1(2.52,11.6) 3,11.6 ; v1(2.52,11.6) 2.03,11.6 ; v1(2.52,11.6) 2.52,11.12 ; v1(2.52,11.6) 2.52,12.09 ; v1(36.65,34.84) 37.13,34.84 ; v1(36.65,34.84) 36.65,35.32 ; v1(36.65,34.84) 36.17,34.84 ; v1(36.65,34.84) 36.65,34.35 ; v1(41.5,75.56) 41.5,76.04 ; v1(41.5,75.56) 41.02,75.56 ; v1(41.5,75.56) 41.5,75.08 ; v1(41.5,75.56) 41.99,75.56 ; 51.5,75.08 v1(51.5,75.56) ; v1(51.5,75.56) 51.5,76.04 ; v1(51.5,75.56) 51.99,75.56 ; v1(51.5,75.56) 51.02,75.56 ; v1(31.5,73.56) 31.99,73.56 ; v1(31.5,73.56) 31.02,73.56 ; v1(31.5,73.56) 31.5,73.08 ; v1(31.5,73.56) 31.5,74.04 ; v1(14.03,57.39) 14.52,57.39 ; v1(14.03,57.39) 13.55,57.39 ; v1(14.03,57.39) 14.03,57.88 ; v1(14.03,57.39) 14.03,56.91 ; 59.03,13.7 v1(59.51,13.7) ; v1(59.51,13.7) 59.51,14.18 ; v1(59.51,13.7) 59.51,13.22 ; v1(59.51,13.7) 60,13.7 ; 22.82,60.52 v1(23.3,60.52) ; v1(23.3,60.52) 23.3,60.03 ; v1(23.3,60.52) 23.79,60.52 ; v1(23.3,60.52) 23.3,61 ; 43.27,10.15 v1(43.27,10.63) ; v1(43.27,10.63) 43.27,11.12 ; v1(43.27,10.63) 42.79,10.63 ; v1(43.27,10.63) 43.76,10.63 ; v1(67.51,7.7) 68,7.7 ; v1(67.51,7.7) 67.03,7.7 ; v1(67.51,7.7) 67.51,8.18 ; v1(67.51,7.7) 67.51,7.22 ; v1(53.5,75.56) 53.5,76.04 ; v1(53.5,75.56) 53.5,75.08 ; v1(53.5,75.56) 53.02,75.56 ; v1(53.5,75.56) 53.99,75.56 ; 57.51,23.22 v1(57.51,23.7) ; v1(57.51,23.7) 58,23.7 ; v1(57.51,23.7) 57.51,24.18 ; v1(57.51,23.7) 57.03,23.7 ; 16.03,9.6 v1(16.52,9.6) ; v1(16.52,9.6) 17,9.6 ; v1(16.52,9.6) 16.52,9.12 ; v1(16.52,9.6) 16.52,10.09 ; v1(36.65,36.84) 37.13,36.84 ; v1(36.65,36.84) 36.65,37.32 ; v1(36.65,36.84) 36.17,36.84 ; v1(36.65,36.84) 36.65,36.35 ; 57.51,21.22 v1(57.51,21.7) ; v1(57.51,21.7) 57.51,22.18 ; v1(57.51,21.7) 58,21.7 ; v1(57.51,21.7) 57.03,21.7 ; 57.51,11.22 v1(57.51,11.7) ; v1(57.51,11.7) 57.03,11.7 ; v1(57.51,11.7) 57.51,12.18 ; v1(57.51,11.7) 58,11.7 ; J2.10 14.88,14.2 ; J2.10 14,14.98 ; J2.10 14,13.42 ; J2.10 13.12,14.2 ; 45.02,75.56 v1(45.5,75.56) ; v1(45.5,75.56) 45.5,75.08 ; v1(45.5,75.56) 45.5,76.04 ; v1(45.5,75.56) 45.99,75.56 ; v1(36.65,32.84) 36.65,33.32 ; v1(36.65,32.84) 36.65,32.35 ; v1(36.65,32.84) 37.13,32.84 ; v1(36.65,32.84) 36.17,32.84 ; 63.51,19.22 v1(63.51,19.7) ; v1(63.51,19.7) 63.03,19.7 ; v1(63.51,19.7) 64,19.7 ; v1(63.51,19.7) 63.51,20.18 ; v1(57.51,15.7) 58,15.7 ; v1(57.51,15.7) 57.51,15.22 ; v1(57.51,15.7) 57.03,15.7 ; v1(57.51,15.7) 57.51,16.18 ; 19.5,75.08 v1(19.5,75.56) ; v1(19.5,75.56) 19.99,75.56 ; v1(19.5,75.56) 19.5,76.04 ; v1(19.5,75.56) 19.02,75.56 ; v1(25.3,58.52) 25.79,58.52 ; v1(25.3,58.52) 24.82,58.52 ; v1(25.3,58.52) 25.3,59 ; v1(25.3,58.52) 25.3,58.03 ; v1(43.27,14.63) 43.76,14.63 ; v1(43.27,14.63) 43.27,15.12 ; v1(43.27,14.63) 43.27,14.15 ; v1(43.27,14.63) 42.79,14.63 ; 14.52,9.12 v1(14.52,9.6) ; v1(14.52,9.6) 14.03,9.6 ; v1(14.52,9.6) 14.52,10.09 ; v1(14.52,9.6) 15,9.6 ; v1(61.51,7.7) 62,7.7 ; v1(61.51,7.7) 61.51,7.22 ; v1(61.51,7.7) 61.03,7.7 ; v1(61.51,7.7) 61.51,8.18 ; v1(14.03,59.39) 14.03,59.88 ; v1(14.03,59.39) 13.55,59.39 ; v1(14.03,59.39) 14.52,59.39 ; v1(14.03,59.39) 14.03,58.91 ; 67.03,11.7 v1(67.51,11.7) ; v1(67.51,11.7) 67.51,11.22 ; v1(67.51,11.7) 68,11.7 ; v1(67.51,11.7) 67.51,12.18 ; 26.82,60.52 v1(27.3,60.52) ; v1(27.3,60.52) 27.3,61 ; v1(27.3,60.52) 27.79,60.52 ; v1(27.3,60.52) 27.3,60.03 ; v1(47.27,2.63) 47.76,2.63 ; v1(47.27,2.63) 46.79,2.63 ; v1(47.27,2.63) 47.27,3.12 ; v1(47.27,2.63) 47.27,2.15 ; v1(61.51,21.7) 61.51,22.18 ; v1(61.51,21.7) 61.03,21.7 ; v1(61.51,21.7) 62,21.7 ; v1(61.51,21.7) 61.51,21.22 ; 44.79,14.63 v1(45.27,14.63) ; v1(45.27,14.63) 45.27,14.15 ; v1(45.27,14.63) 45.76,14.63 ; v1(45.27,14.63) 45.27,15.12 ; 45.02,73.56 v1(45.5,73.56) ; v1(45.5,73.56) 45.5,74.04 ; v1(45.5,73.56) 45.99,73.56 ; v1(45.5,73.56) 45.5,73.08 ; 43.5,73.08 v1(43.5,73.56) ; v1(43.5,73.56) 43.99,73.56 ; v1(43.5,73.56) 43.02,73.56 ; v1(43.5,73.56) 43.5,74.04 ; v1(18.52,11.6) 19,11.6 ; v1(18.52,11.6) 18.03,11.6 ; v1(18.52,11.6) 18.52,12.09 ; v1(18.52,11.6) 18.52,11.12 ; 43.02,75.56 v1(43.5,75.56) ; v1(43.5,75.56) 43.5,76.04 ; v1(43.5,75.56) 43.99,75.56 ; v1(43.5,75.56) 43.5,75.08 ; v1(16.52,7.6) 17,7.6 ; v1(16.52,7.6) 16.03,7.6 ; v1(16.52,7.6) 16.52,8.09 ; v1(16.52,7.6) 16.52,7.12 ; 59.51,7.22 v1(59.51,7.7) ; v1(59.51,7.7) 59.51,8.18 ; v1(59.51,7.7) 60,7.7 ; v1(59.51,7.7) 59.03,7.7 ; v1(57.51,9.7) 58,9.7 ; v1(57.51,9.7) 57.51,10.18 ; v1(57.51,9.7) 57.03,9.7 ; v1(57.51,9.7) 57.51,9.22 ; J11.4 51.35,30.13 ; J11.4 52.28,29.2 ; J11.4 51.35,28.27 ; J11.4 50.42,29.2 ; 63.51,7.22 v1(63.51,7.7) ; v1(63.51,7.7) 63.51,8.18 ; v1(63.51,7.7) 63.03,7.7 ; v1(63.51,7.7) 64,7.7 ; 9.5,73.08 v1(9.5,73.56) ; v1(9.5,73.56) 9.99,73.56 ; v1(9.5,73.56) 9.02,73.56 ; v1(9.5,73.56) 9.5,74.04 ; 47.27,12.15 v1(47.27,12.63) ; v1(47.27,12.63) 46.79,12.63 ; v1(47.27,12.63) 47.27,13.12 ; v1(47.27,12.63) 47.76,12.63 ; v1(15.5,73.56) 15.5,74.04 ; v1(15.5,73.56) 15.99,73.56 ; v1(15.5,73.56) 15.02,73.56 ; v1(15.5,73.56) 15.5,73.08 ; v1(61.51,17.7) 62,17.7 ; v1(61.51,17.7) 61.51,18.18 ; v1(61.51,17.7) 61.03,17.7 ; v1(61.51,17.7) 61.51,17.22 ; v1(36.92,54.81) 36.92,55.29 ; v1(36.92,54.81) 36.44,54.81 ; v1(36.92,54.81) 36.92,54.33 ; v1(36.92,54.81) 37.41,54.81 ; 20.52,9.12 v1(20.52,9.6) ; v1(20.52,9.6) 20.52,10.09 ; v1(20.52,9.6) 21,9.6 ; v1(20.52,9.6) 20.03,9.6 ; 65.03,7.7 v1(65.51,7.7) ; v1(65.51,7.7) 66,7.7 ; v1(65.51,7.7) 65.51,8.18 ; v1(65.51,7.7) 65.51,7.22 ; v1(47.27,14.63) 47.27,15.12 ; v1(47.27,14.63) 46.79,14.63 ; v1(47.27,14.63) 47.76,14.63 ; v1(47.27,14.63) 47.27,14.15 ; v1(59.51,11.7) 59.51,12.18 ; v1(59.51,11.7) 59.51,11.22 ; v1(59.51,11.7) 60,11.7 ; v1(59.51,11.7) 59.03,11.7 ; 25.5,75.08 v1(25.5,75.56) ; v1(25.5,75.56) 25.5,76.04 ; v1(25.5,75.56) 25.02,75.56 ; v1(25.5,75.56) 25.99,75.56 ; v1(31.04,50.78) 31.04,51.27 ; v1(31.04,50.78) 31.52,50.78 ; v1(31.04,50.78) 31.04,50.3 ; 65.03,9.7 v1(65.51,9.7) ; v1(65.51,9.7) 65.51,10.18 ; v1(65.51,9.7) 66,9.7 ; v1(65.51,9.7) 65.51,9.22 ; 22.82,56.52 v1(23.3,56.52) ; v1(23.3,56.52) 23.3,57 ; v1(23.3,56.52) 23.3,56.03 ; v1(23.3,56.52) 23.79,56.52 ; 66.68,48.15 J3.21 64.82,48.15 ; v1(47.27,0.63) 47.76,0.63 ; v1(47.27,0.63) 46.79,0.63 ; v1(47.27,0.63) 47.27,1.12 ; v1(47.27,0.63) 47.27,0.15 ; 67.03,13.7 v1(67.51,13.7) ; v1(67.51,13.7) 67.51,13.22 ; v1(67.51,13.7) 67.51,14.18 ; v1(67.51,13.7) 68,13.7 ; 66.68,52.15 J3.29 64.82,52.15 ; v1(33.04,56.78) 33.04,57.27 ; v1(33.04,56.78) 32.56,56.78 ; v1(33.04,56.78) 33.04,56.3 ; v1(33.04,56.78) 33.52,56.78 ; 67.03,21.7 v1(67.51,21.7) ; v1(67.51,21.7) 67.51,21.22 ; v1(67.51,21.7) 67.51,22.18 ; v1(67.51,21.7) 68,21.7 ; v1(31.04,52.78) 31.52,52.78 ; v1(31.04,52.78) 31.04,53.27 ; v1(31.04,52.78) 31.04,52.3 ; 39.5,73.08 v1(39.5,73.56) ; v1(39.5,73.56) 39.99,73.56 ; v1(39.5,73.56) 39.5,74.04 ; v1(39.5,73.56) 39.02,73.56 ; 54.02,5.7 J12.6 ; J12.6 54.83,4.9 ; J12.6 54.83,6.5 ; J12.6 55.63,5.7 ; 34.17,36.84 v1(34.65,36.84) ; v1(34.65,36.84) 34.65,37.32 ; v1(34.65,36.84) 34.65,36.35 ; v1(34.65,36.84) 35.13,36.84 ; 38.79,14.63 v1(39.27,14.63) ; v1(39.27,14.63) 39.27,14.15 ; v1(39.27,14.63) 39.27,15.12 ; v1(39.27,14.63) 39.76,14.63 ; 63.51,23.22 v1(63.51,23.7) ; v1(63.51,23.7) 63.51,24.18 ; v1(63.51,23.7) 63.03,23.7 ; v1(63.51,23.7) 64,23.7 ; 10.03,7.6 v1(10.52,7.6) ; v1(10.52,7.6) 10.52,7.12 ; v1(10.52,7.6) 11,7.6 ; v1(10.52,7.6) 10.52,8.09 ; v1(43.27,0.63) 43.76,0.63 ; v1(43.27,0.63) 43.27,0.15 ; v1(43.27,0.63) 43.27,1.12 ; v1(43.27,0.63) 42.79,0.63 ; 46.79,6.63 v1(47.27,6.63) ; v1(47.27,6.63) 47.27,6.15 ; v1(47.27,6.63) 47.27,7.12 ; v1(47.27,6.63) 47.76,6.63 ; v1(65.51,19.7) 65.51,20.18 ; v1(65.51,19.7) 66,19.7 ; v1(65.51,19.7) 65.51,19.22 ; v1(65.51,19.7) 65.03,19.7 ; v1(11.5,75.56) 11.5,76.04 ; v1(11.5,75.56) 11.99,75.56 ; v1(11.5,75.56) 11.5,75.08 ; v1(11.5,75.56) 11.02,75.56 ; v1(47.27,4.63) 47.27,5.12 ; v1(47.27,4.63) 47.27,4.15 ; v1(47.27,4.63) 47.76,4.63 ; v1(47.27,4.63) 46.79,4.63 ; 66.68,44.15 J3.13 64.82,44.15 ; v1(23.5,73.56) 23.5,74.04 ; v1(23.5,73.56) 23.99,73.56 ; v1(23.5,73.56) 23.5,73.08 ; v1(23.5,73.56) 23.02,73.56 ; 49.5,73.08 v1(49.5,73.56) ; v1(49.5,73.56) 49.99,73.56 ; v1(49.5,73.56) 49.02,73.56 ; v1(49.5,73.56) 49.5,74.04 ; 64.82,40.15 J3.5 66.68,40.15
  vias: v2(22.15,28.35) v2(53.67,37.23) v3(6,73.5) v3(6,5) v3(64,73.5) v3(64,5)
